# Altium PCB 100862.pcbdoc (part 1 of 3)
Units mm, origin at the board's own origin, x right, y up, seen from the top; angles counter-clockwise.
Board outline 48 x 50 mm, 4 copper layers (Top Layer, Internal Ground, Internal Power, Bottom Layer), stack 1.481 mm thick; 185 components, 111 nets, 536 pads, 346 vias.
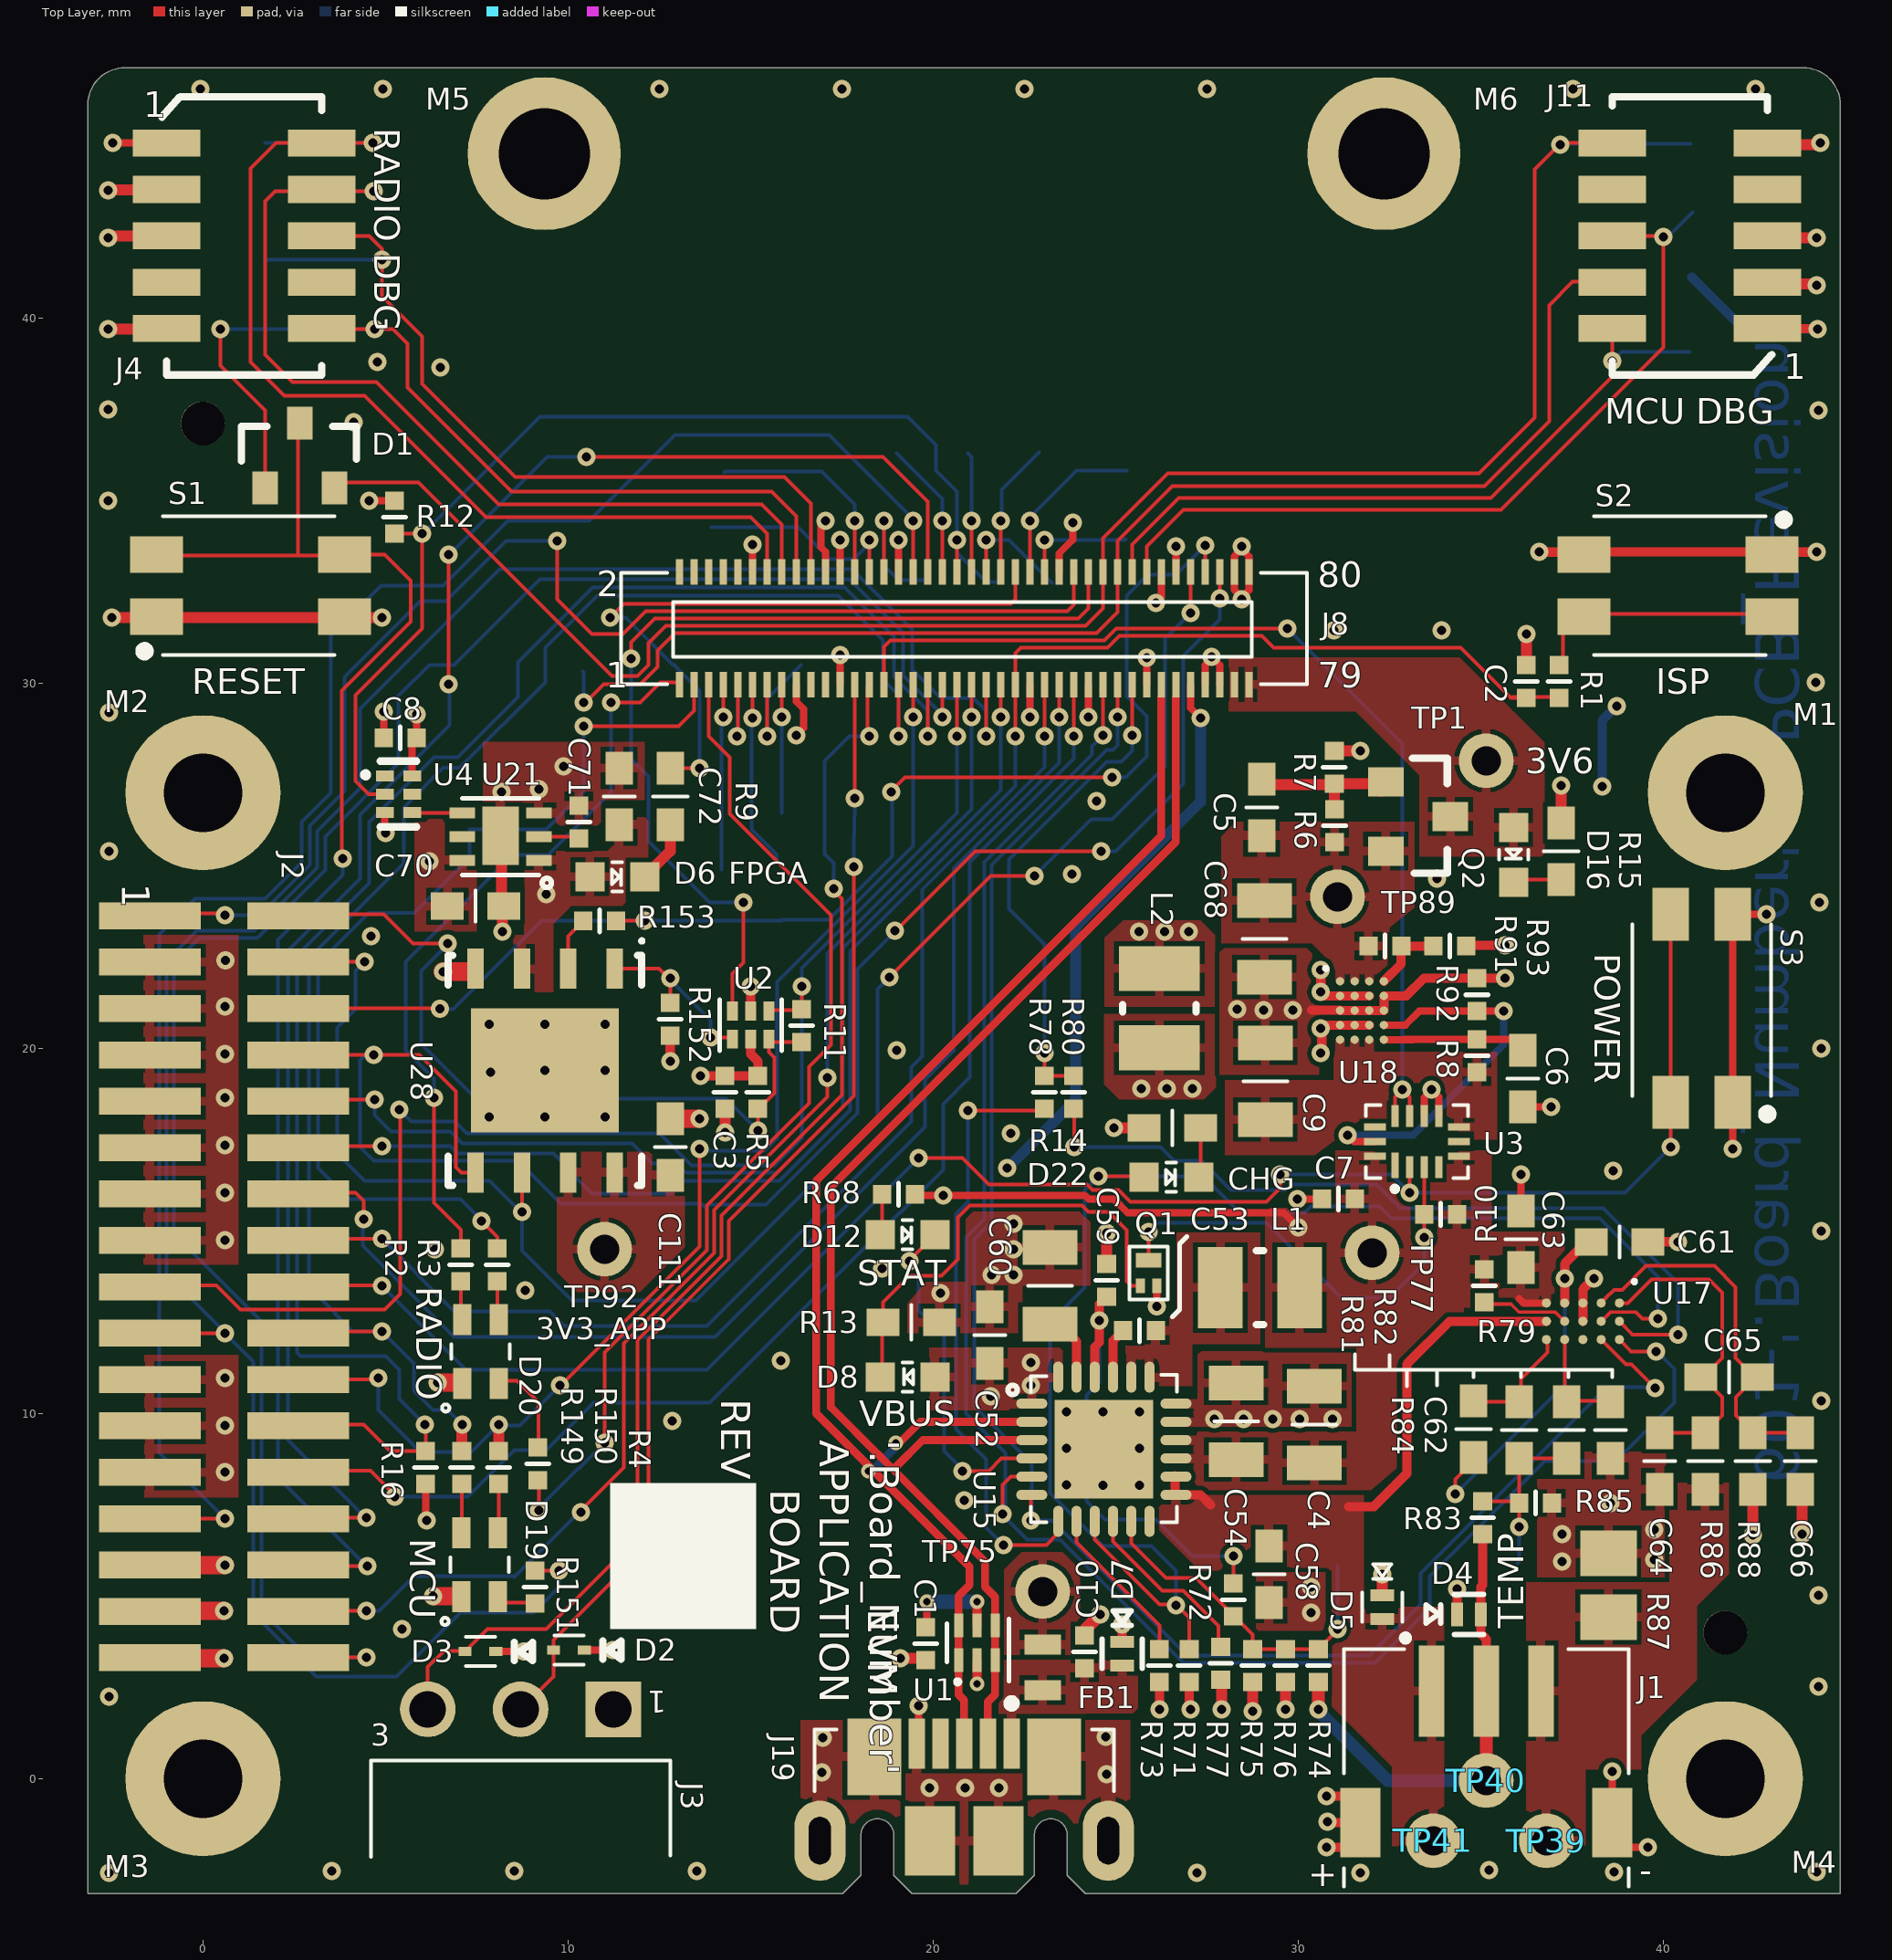
[diagram p0: Top Layer view]
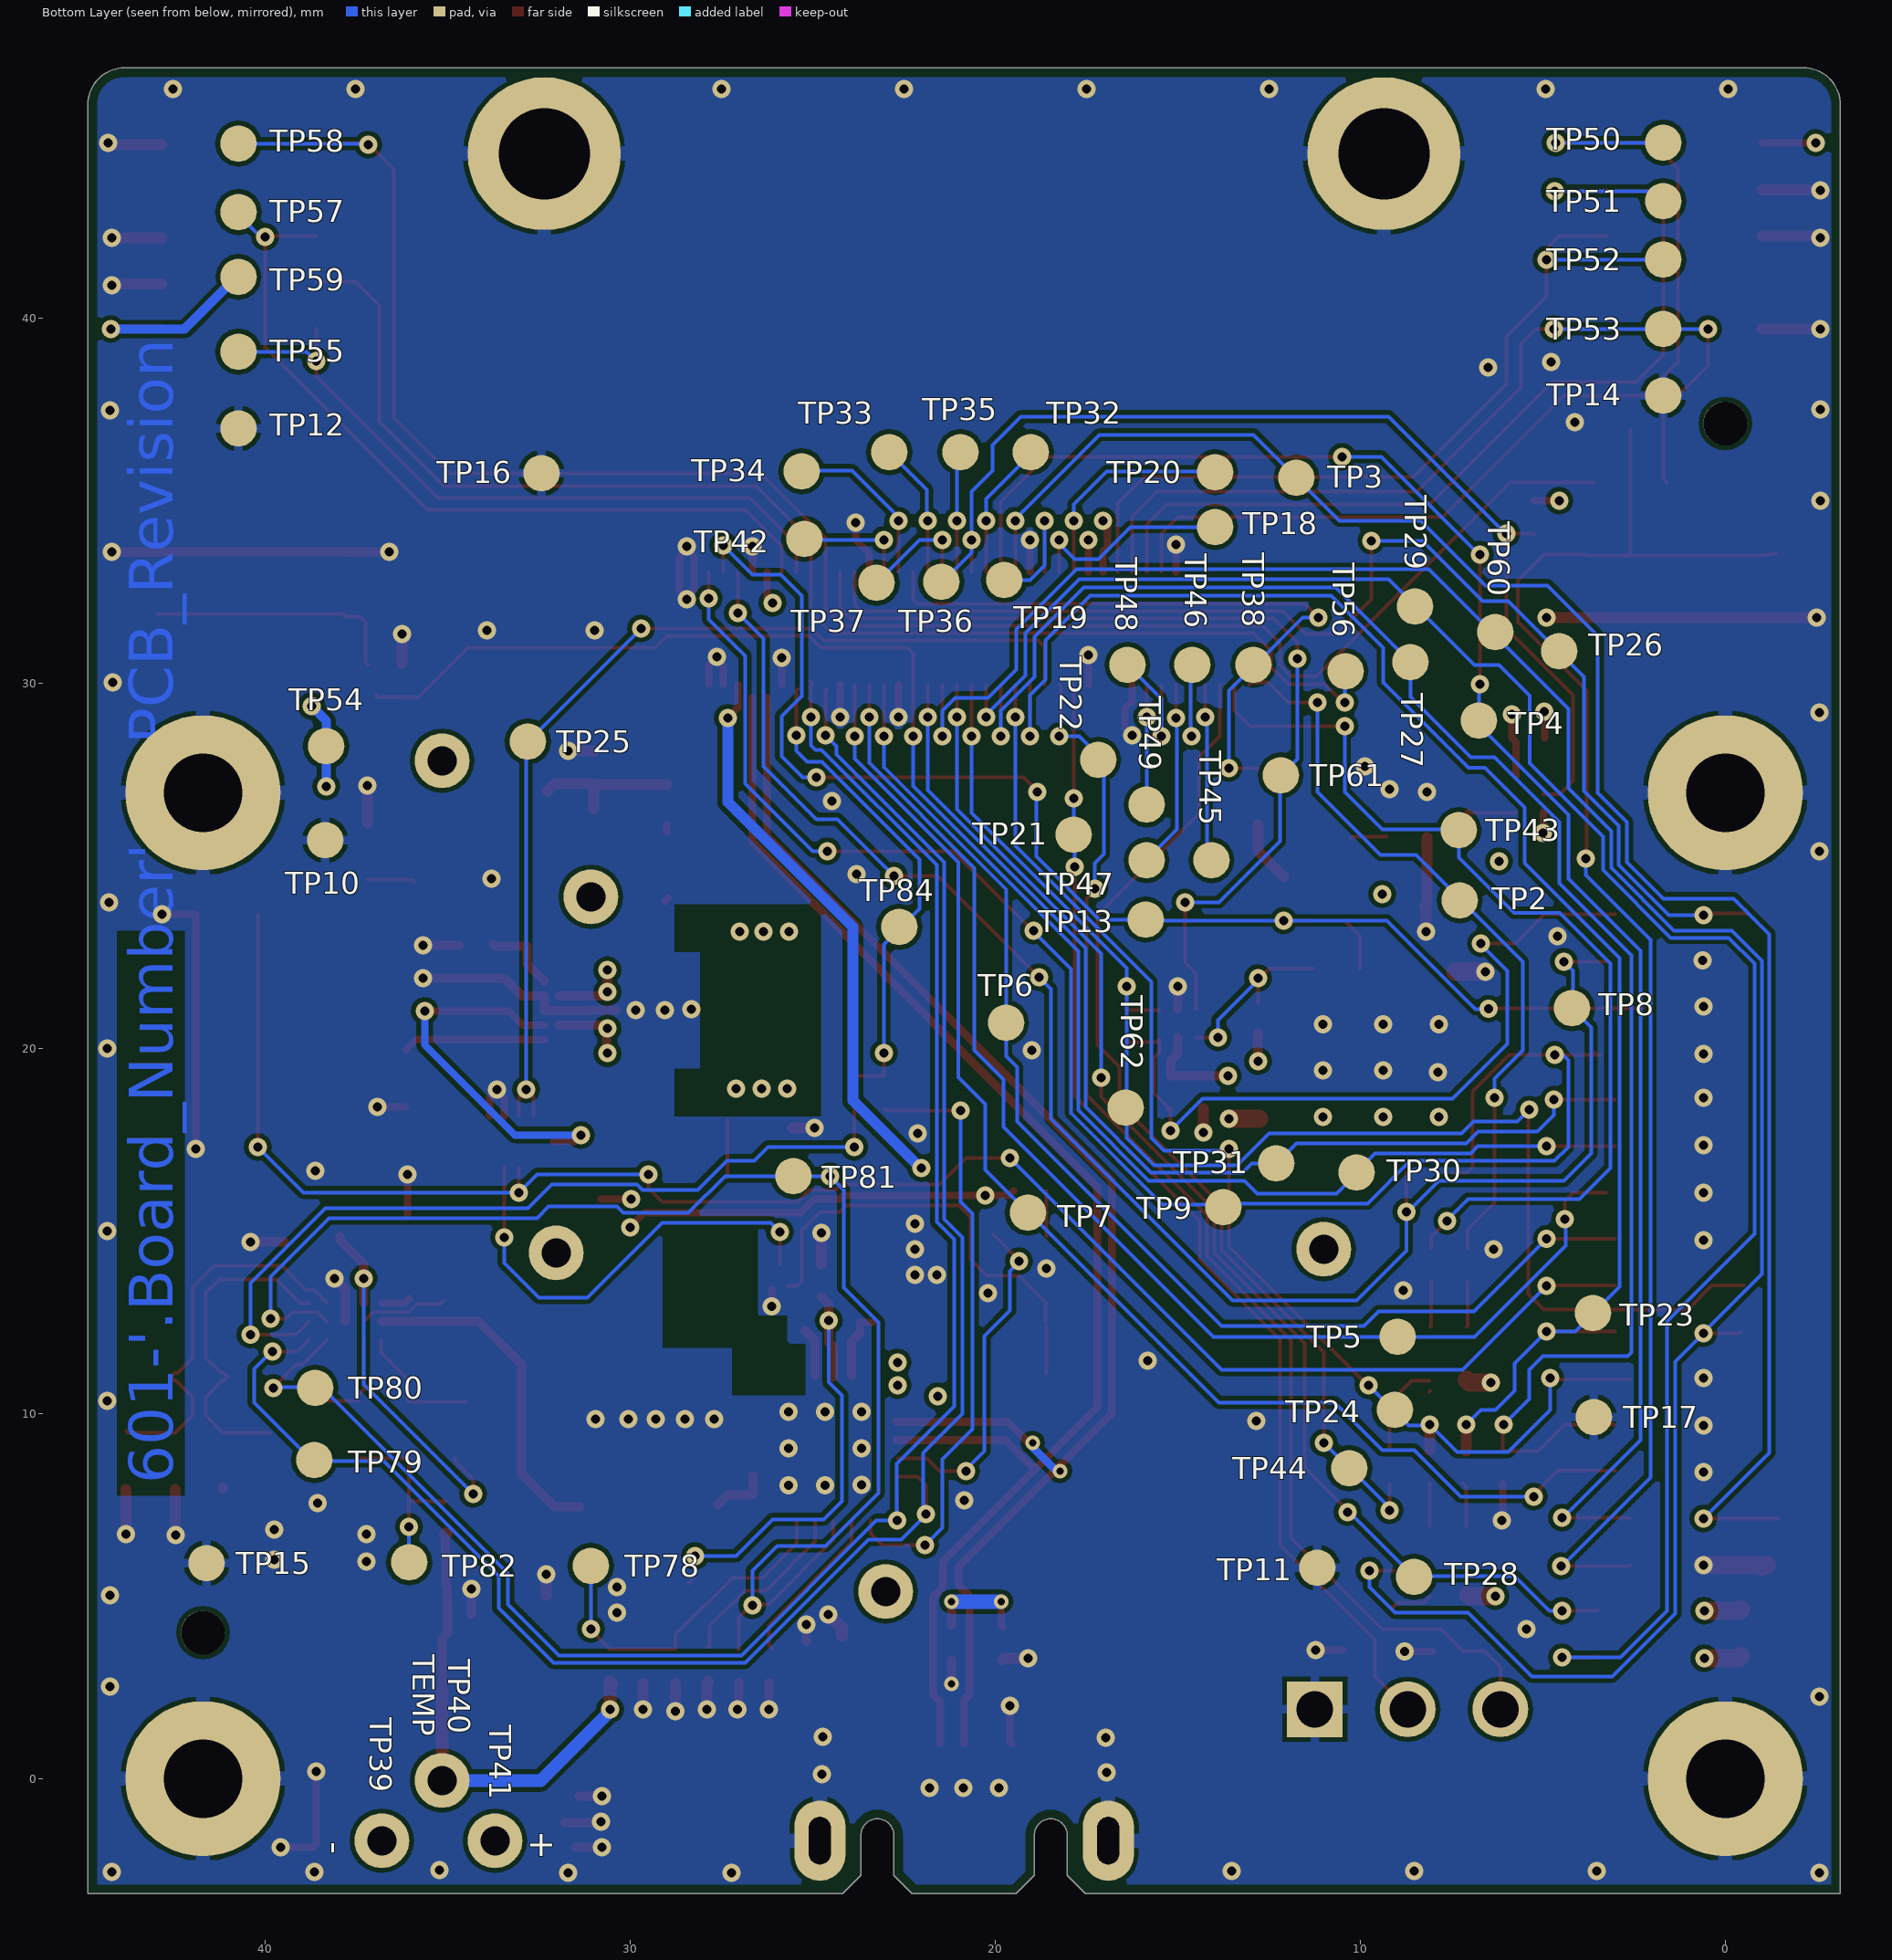
[diagram p1: Bottom Layer view, seen from below]
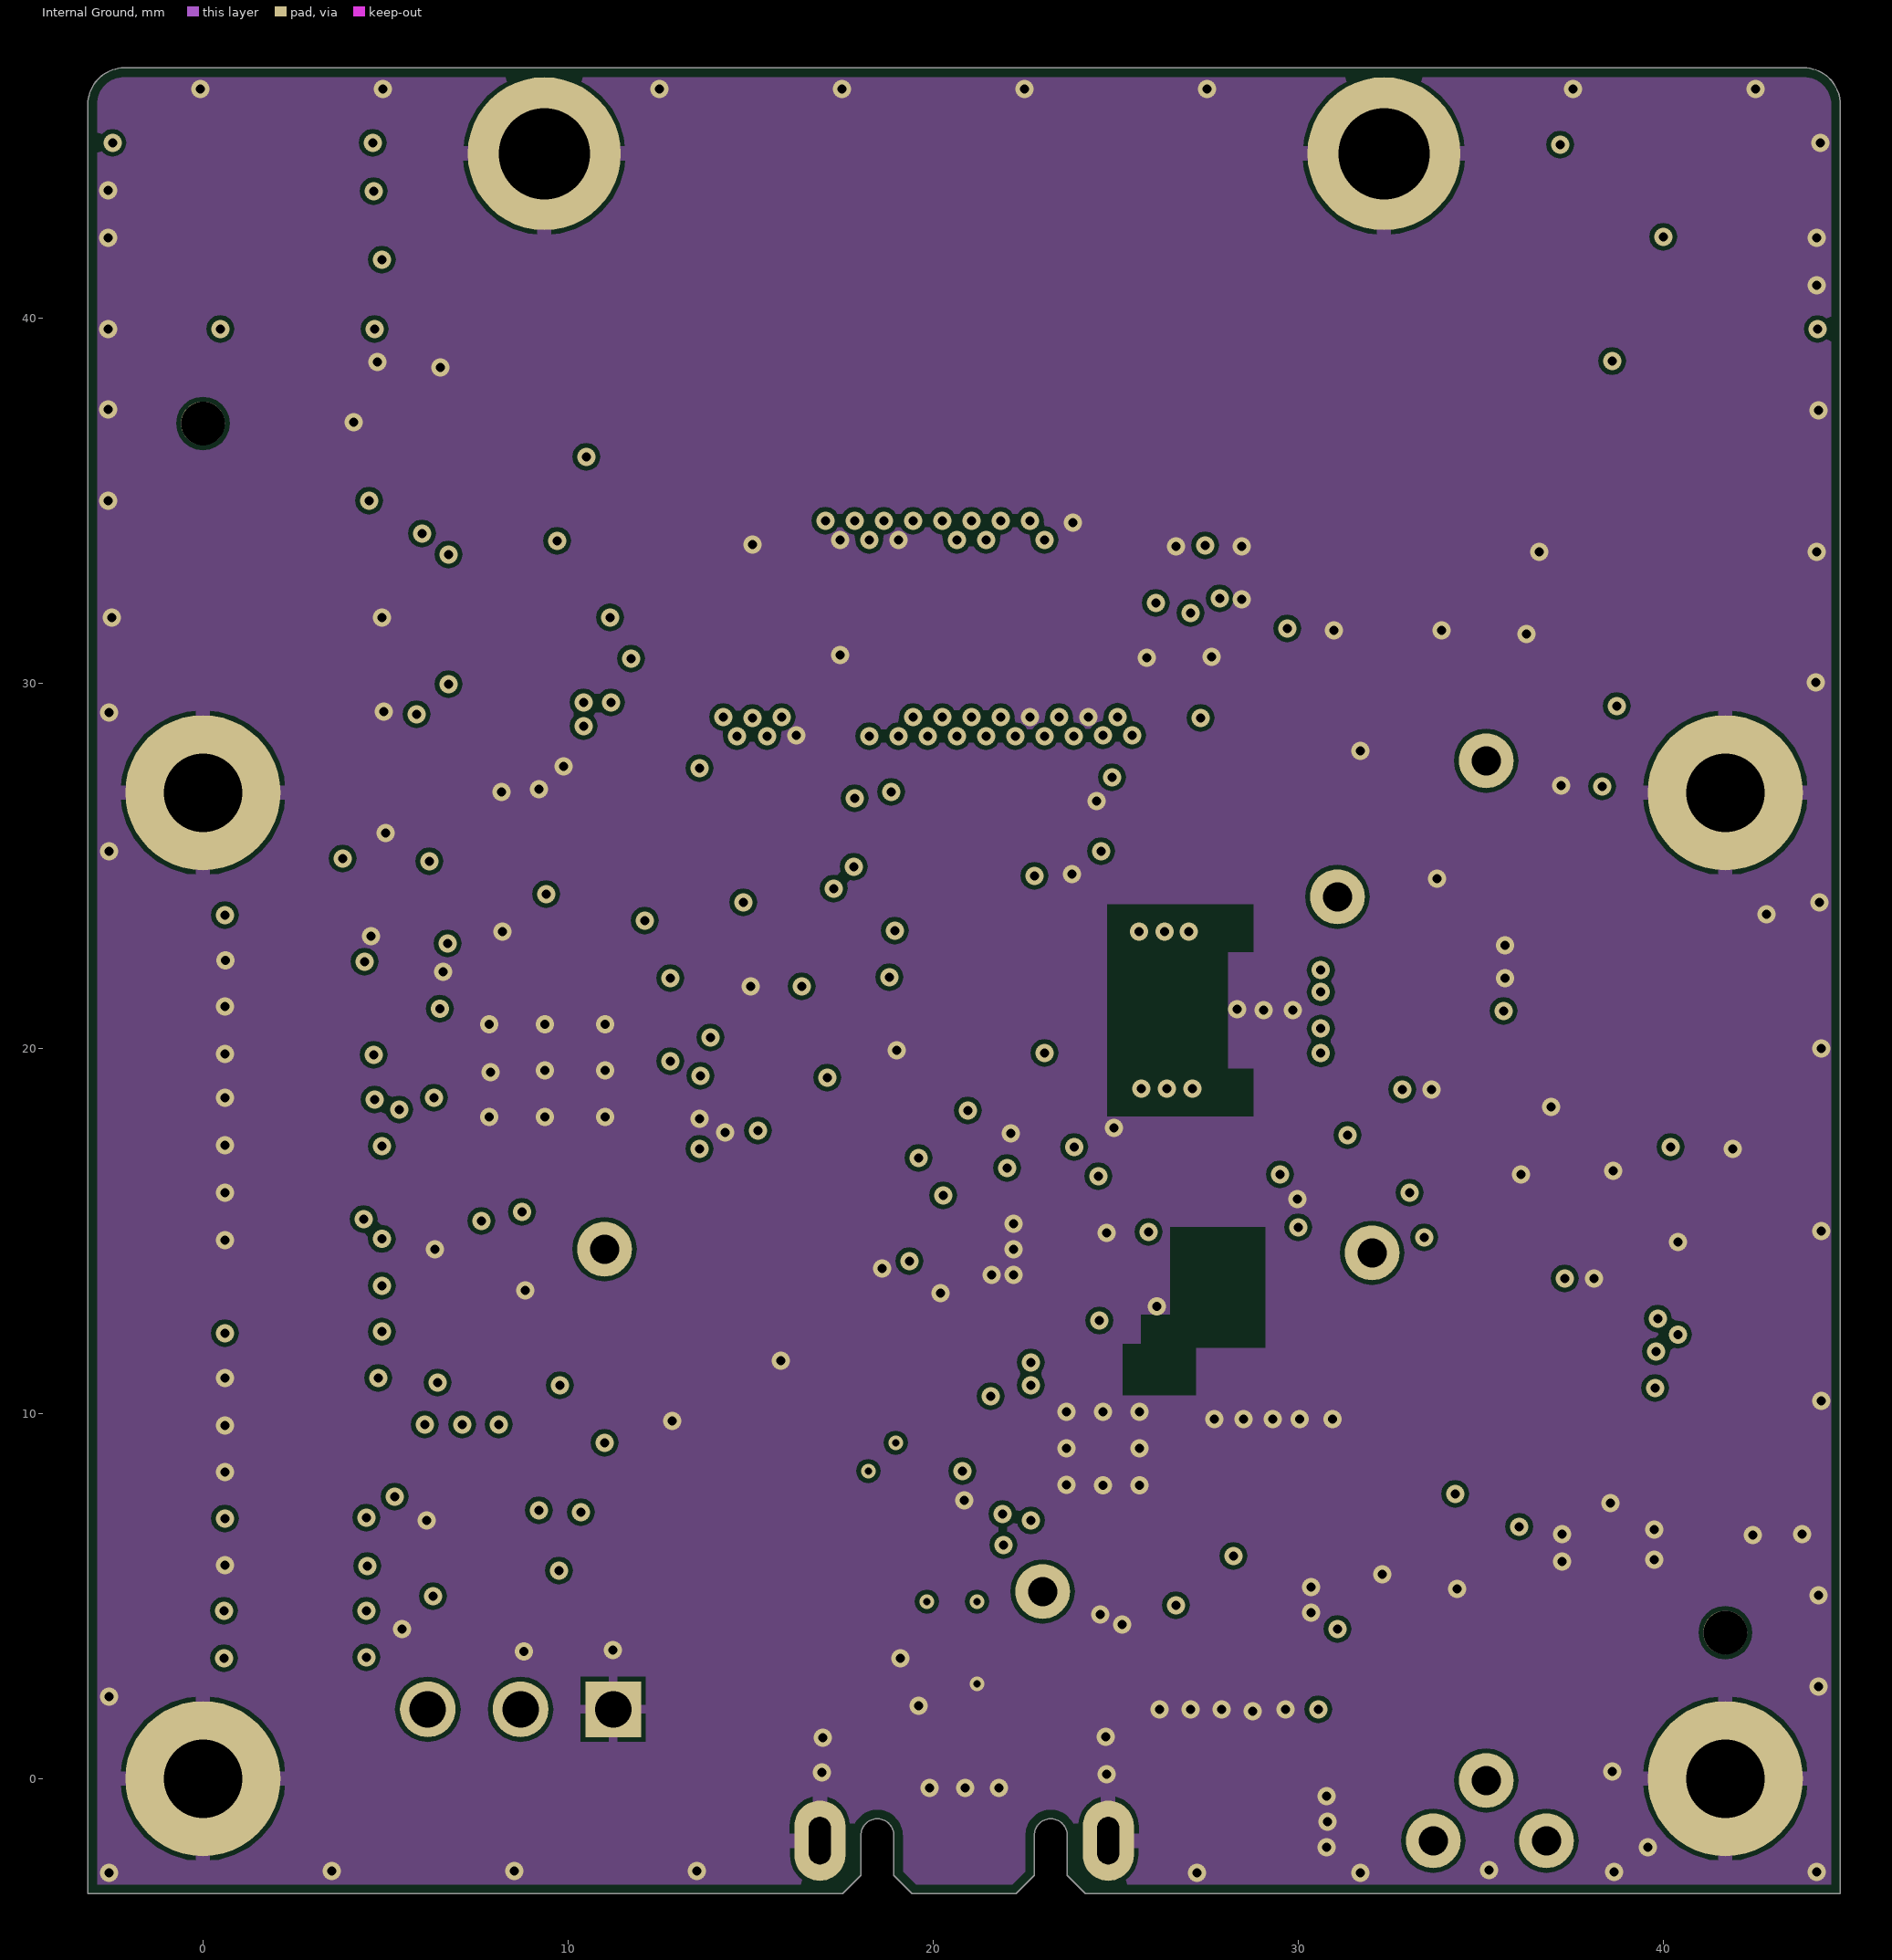
[diagram p2: Internal Ground]
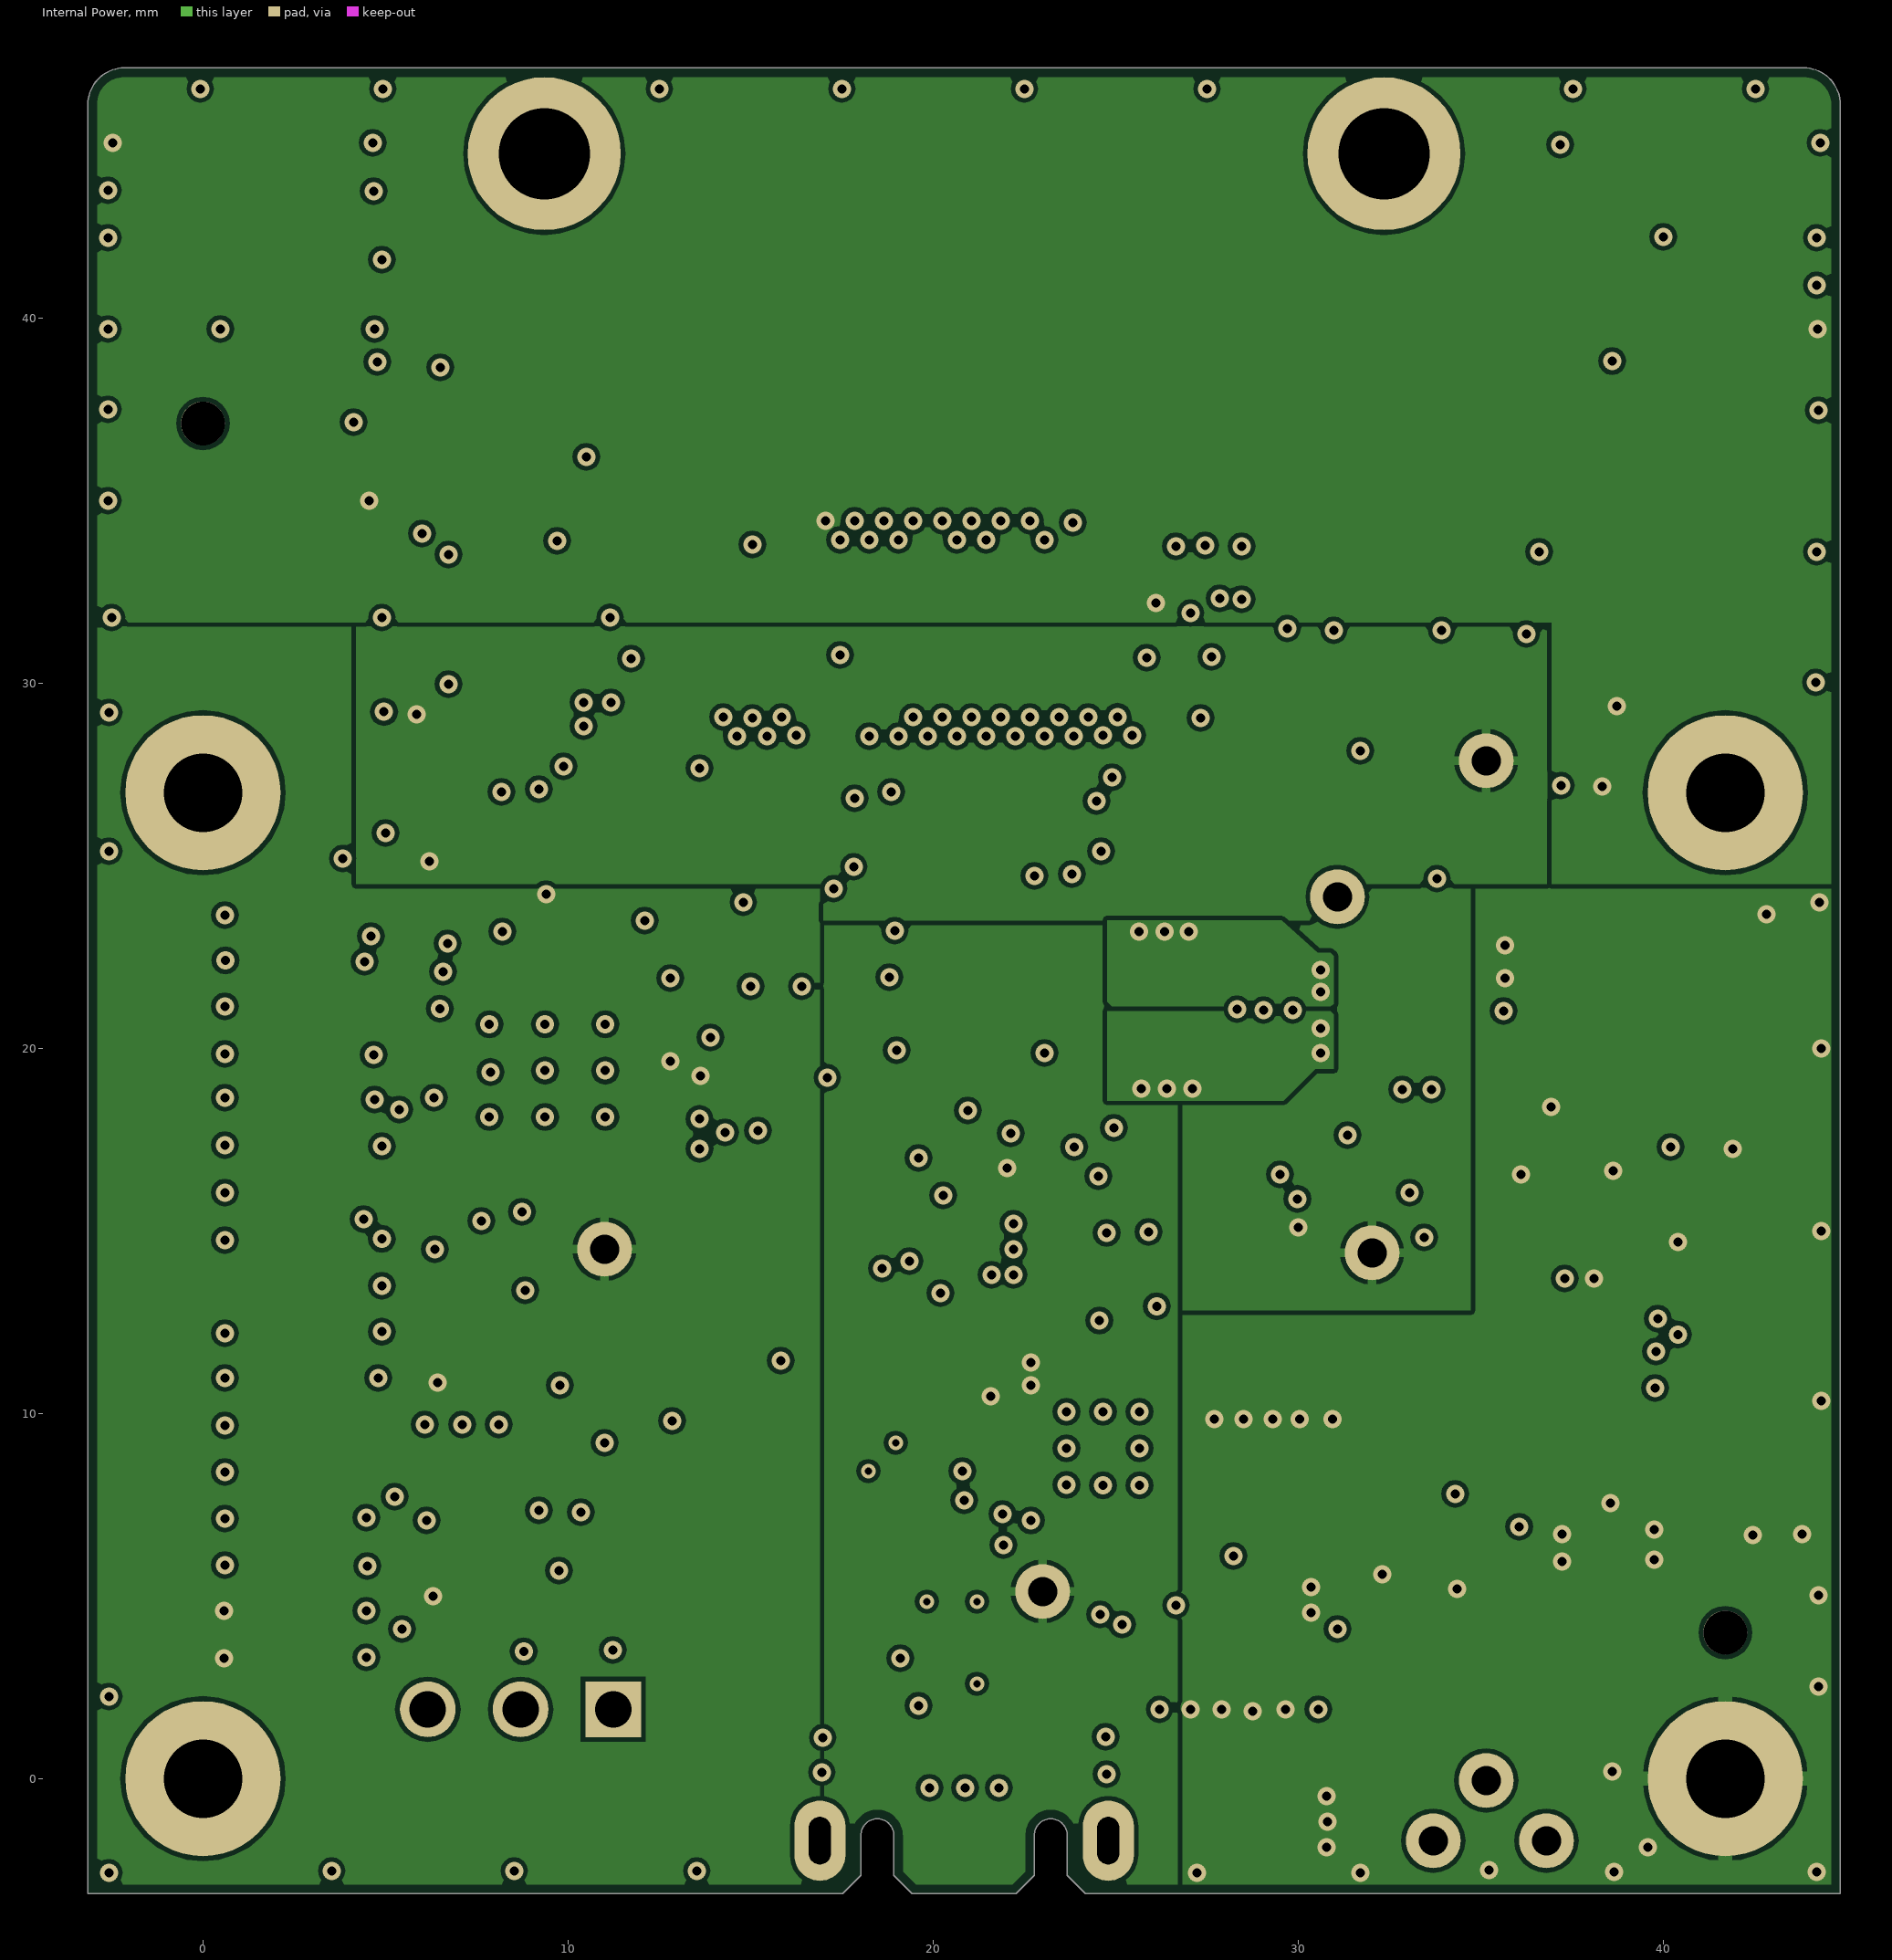
[diagram p3: Internal Power]

## Layer stack, top to bottom
Top Solder: solder mask 0.0102, Solder Resist, Dk 3.5
Top Layer: signal copper 0.0356
Dielectric 1: core 0.254, FR-4, Dk 4.2
Internal Ground: signal copper 0.036
Dielectric 3: prepreg 0.83, Dk 4.2
Internal Power: signal copper 0.036
Dielectric 2: core 0.254, Dk 4.2
Bottom Layer: signal copper 0.0356
Bottom Solder: solder mask 0.0102, Solder Resist, Dk 3.5

## Board outline
-3.15,-3.15 17.525,-3.15 18.025,-2.65 18.025,-1.55 cw(c18.475,-1.55) 18.925,-1.55 18.925,-2.65 19.425,-3.15 22.275,-3.15 22.775,-2.65 22.775,-1.55 cw(c23.225,-1.55) 23.675,-1.55 23.675,-2.65 24.175,-3.15 44.85,-3.15 44.85,45.85 ccw(c43.85,45.85) 43.85,46.85 -2.15,46.85 ccw(c-2.15,45.85) -3.15,45.85

## Design rules (kind name [scope] priority, off if disabled: settings)
BoardOutlineClearance [All] p1: gap=0.25 except(0: Text-OutlineEdge)
Clearance Clearance_1 [InNamedPolygon('VCC_3V3_CORE') vs InNet('GND')] p1: gap=0.254
Clearance PWR [OnLayer('Power')] p2: gap=0.2
Clearance ANT_PIN [InPadClass('RADIO_PIN')] p3: gap=0.25
Clearance Keepout_clear [IsKeepOut vs OnLayer('Top Layer')] p4: gap=0
Clearance Polygon_Clearance [InPolygon] p5: gap=0.125
Clearance Narrow_clearance [InNetClass('Narrow')] p6: gap=0.08
Clearance RF_Clearance [InNetClass('RF')] p7: gap=0.125
Clearance [All] p8: gap=0.1 except(0: Arc-Region Track-Region SMDPad-Region THPad-Region Via-Region Fill-Region Region-Region)
ComponentClearance [All] p1: gap=0.18 collisioncheckmode=3 verticalgap=0.18 showdistances=FALSE
DiffPairsRouting [InDifferentialPair('USB_D')] p1: maxlimit=0.152 minlimit=0.152 mostfreqgap=0.152 toplayer_minwidth=0.213 toplayer_maxwidth=0.213 toplayer_prefwidth=0.213 midlayer1_minwidth=0.213 midlayer1_maxwidth=0.213 midlayer1_prefwidth=0.213 midlayer2_minwidth=0.213 midlayer2_maxwidth=0.213 midlayer2_prefwidth=0.213 bottomlayer_minwidth=0.213 bottomlayer_maxwidth=0.213 bottomlayer_prefwidth=0.213 maxuncoupledlength=12.7
HoleSize [All] p1: absolutevalues=TRUE maxlimit=3.5 minlimit=0.025 maxpercent=80.000 minpercent=20.000
MinimumSolderMaskSliver MinimumSolderMaskSliver_1 [isvia vs IsPad] p1: minsoldermaskwidth=0
MinimumSolderMaskSliver [All] p2: minsoldermaskwidth=0.05
PlaneClearance [All] p1: clearance=0.25
PlaneConnect [All] p1: planeconnectstyle=Direct reliefexpansion=0.508 reliefentries=4 reliefconductorwidth=0.254 reliefairgap=0.254
PolygonConnect MTG_CONNECT [InPadClass('Thick_thermals')] p1: connectstyle=Relief reliefconductorwidth=0.4 reliefentries=4 polygonreliefangle="90 Angle" airgapwidth=0.125
PolygonConnect THPin [All vs InPadClass('THPin_Polygon')] p2: connectstyle=Relief reliefconductorwidth=0.254 reliefentries=4 polygonreliefangle="90 Angle" airgapwidth=0.125
PolygonConnect POLY_VIA [IsVia vs IsPolygon] p3: connectstyle=Direct reliefconductorwidth=0.254 reliefentries=4 polygonreliefangle="90 Angle" airgapwidth=0.254
PolygonConnect [All] p4: connectstyle=Relief reliefconductorwidth=0.25 reliefentries=4 polygonreliefangle="90 Angle" airgapwidth=0.125
RoomDefinition U_CoreModule [InComponentClass('U_CoreModule')] p1: confinementstyle=ConfineIn formatcopy=TRUE lockcomponents=FALSE outline 83.336,-66.209 91.237,-66.209 91.237,-39.783 83.336,-39.783
RoomDefinition U_Breakout [InComponentClass('U_Breakout')] p2 off: confinementstyle=ConfineIn formatcopy=TRUE lockcomponents=FALSE outline 48.303,13.57 48.303,5.57 54.303,5.57 54.303,13.57
RoomDefinition U_Regulation [InComponentClass('U_Regulation')] p3 off: confinementstyle=ConfineIn formatcopy=TRUE lockcomponents=FALSE outline 29.394,128.03 321.895,128.03 321.895,145.53 29.394,145.53
RoomDefinition U_Charging [InComponentClass('U_Charging')] p4 off: confinementstyle=ConfineIn formatcopy=TRUE lockcomponents=FALSE outline 138.192,-67.742 563.302,-67.742 563.302,-52.742 138.192,-52.742
RoutingVias [All] p1: holewidth=0.25 width=0.5 viastyle="Through Hole" minholewidth=0.25 minwidth=0.5 maxholewidth=0.25 maxwidth=0.5 useviatemplates=TRUE viatemplateguid#1={2D41CD12-448D-474D-BA40-36D4687D2B42} viatemplatename#1=v50h25m0mx0
SilkToSilkClearance [All] p1 off: silktosilkclearance=0
SilkToSolderMaskClearance [IsPad] p1: minsilkscreentomaskgap=0.05 clearancetoexposedcopper=TRUE
SolderMaskExpansion [All] p1: expansion=0.05
Width Narrow [InNetClass('Narrow')] p1: maxlimit=0.1 minlimit=0.08 preferedwidth=0.1
Width RF_Width [InNetClass('RF')] p2: maxlimit=0.59 minlimit=0.2 preferedwidth=0.59
Width PWR_GND [InNetClass('PWR_GND')] p3: maxlimit=1 minlimit=0.2 preferedwidth=0.3
Width CRITICAL [InNetClass('MOTOR_DRIVERS')] p4: maxlimit=0.4 minlimit=0.3 preferedwidth=0.4
Width [All] p5: maxlimit=0.508 minlimit=0.1 preferedwidth=0.1
22 further rules are at their usual default settings.

## Classes and differential pairs
net class PWR_GND: 3V6_EN 3V6_FB 3V6_OUT 3V6_VINA BAT_CE BATT+ BATT- BATT_TS GND USB_VBUS V_SYS VBUS_IN VCC_3V3_APP VCC_3V3_CORE VCC_3V6
component class U_CoreModule: J8 M5 M6
component class U_Charging: C1 C4 C10 C52 C53 C54 C58 C59 C60 C61 C62 C63 C64 C65 C66 D4 D5 D7 D8 D12 D22 FB1 J1 J19 L1 Q1 R13 R14 R68 R71 R72 R73 R74 R75 R76 R77 R78 R79 R80 R81 R82 R83 R84 R85 R86 R87 R88 TP10 TP11 TP12 TP39 TP40 TP41 TP75 TP77 TP78 TP79 TP80 TP81 TP82 TP84 U1 U15 U17
component class U_Breakout: C2 C3 C111 D1 D2 D3 D6 D19 D20 J2 J3 J4 J11 R1 R2 R3 R4 R5 R9 R11 R12 R16 R149 R150 R151 R152 R153 S1 S2 TP2 TP3 TP4 TP5 TP6 TP7 TP8 TP9 TP13 TP14 TP15 TP16 TP17 TP18 TP19 TP20 TP21 TP22 TP23 TP24 TP25 TP26 TP27 TP28 TP29 TP30 TP31 TP32 TP33 TP34 TP35 TP36 TP37 TP38 TP42 TP43 TP44 TP45 TP46 TP47 TP48 TP49 TP50 TP51 TP52 TP53 TP54 TP55 TP56 TP57 TP58 TP59 TP60 TP61 TP62 U2 U28
component class U_Regulation: C5 C6 C7 C8 C9 C68 C70 C71 C72 D16 L2 M1 M2 M3 M4 P1 Q2 R6 R7 R8 R10 R15 R91 R92 R93 S3 TP1 TP89 TP92 U3 U4 U18 U21
pad class THPin_Polygon: J8-1 J8-2 J8-3 J8-4 J8-5 J8-6 J8-7 J8-8 J8-9 J8-10
pad class Thick_thermals: J19-10 J19-11 M1-1 M2-1 M3-1 M4-1 M5-1 M6-1
net class Narrow: BAT_CE CHG_C\E\
differential pair DP_CON: +"" -""
differential pair USB_D: +USB_D_P -USB_D_N
differential pair SR: +SRP -SRN

## Components (designator, comment, footprint, x,y, rotation, side; value= is the part's Value field where it differs from the comment)
C1 "0.1uF" 0402-IPCsm_55#1 19.8,3.7 r270 top
C2 "0.1uF" 0402-IPCsm_55#1 36.25,30.05 r90 top
C3 "0.1uF" 0402-IPCsm_55#1 14.3,18.8 r90 top
C4 "47uF" 0805-ipcsm_145#1 30.447,9.7 r90 top
C5 "1uF" 0603-IPCsm_90#1 29,26.6 r270 top
C6 "0.1UF" 0603-ipcsm_90#1 36.15,19.175 r90 top
C7 "0.1uF" 0402-IPCsm_55#1 31.1,15.875 r0 top
C8 "0.1uF" 0402-IPCsm_55#1 5.4,28.5 r0 top
C9 "47uF" 0805-ipcsm_145#1 29.1,19.1 r90 top
C10 "0.1uF" 0402-IPCsm_55#1 24.15,3.475 r270 top
C52 "1uF" 0603-IPCsm_90#2 21.554,12.148 r270 top
C53 "0.047uF" 0402-IPCsm_55#2 25.654,12.268 r180 top
C54 "47uF" 0805-ipcsm_145#1 28.301,9.787 r90 top
C58 "1uF" 0603-IPCsm_90#2 29.2,5.6 r90 top
C59 "10uF" 0402-IPCsm_55#2 24.754,13.648 r90 top
C60 "22uF" 0805-IPCsm_100 23.2,13.5 r90 top
C61 "1uF" 0603-IPCsm_90#2 38.8,14.7 r180 top
C62 "0.1uF" 0603-ipcsm_90#2 38.554,9.548 r90 top
C63 "0.1uF" 0603-ipcsm_90#2 36.1,14.775 r270 top
C64 "0.1uF" 0603-ipcsm_90#2 39.9,8.7 r90 top
C65 "0.1uF" 0603-ipcsm_90#2 41.8,11 r180 top
C66 "0.1uF" 0603-ipcsm_90#2 43.754,8.7 r270 top
C68 "47uF" 0805-ipcsm_145#2 29.075,23 r270 top
C70 "10uF" 0603-IPCsm_90#2 7.472,23.89 r180 top
C71 "0.01uF" 0402-IPCsm_55#2 10.3,26.2 r90 top
C72 "10uF" 0603-IPCsm_90#2 11.4,26.9 r270 top
C111 "0.1uF" 0603-ipcsm_90#2 12.8,17.3 r90 top
D1 "BAV70LT1G" SOT23_44H 2.65,36.472 r0 top
D2 "ESD9R3.3ST5G" sod923-40 10.025,3.525 r0 top
D3 "ESD9R3.3ST5G" sod923-40 7.6,3.486 r0 top
D4 "SP1003-01ETG" SOD882-60 34.675,4.5 r180 top
D5 "SP1003-01ETG" SOD882-60 32.3,4.7 r90 top
D6 "Green" led_ltst-c191kgkt_s80#1 11.35,24.7 r0 top
D7 "SP1003-01ETG" SOD882-60 25.175,3.425 r90 top
D8 "Green" led_ltst-c191kgkt_s80#2 19.3,11 r180 top
D12 "Green" led_ltst-c191kgkt_s80#2 19.3,14.9 r0 top
D16 "Green" led_ltst-c191kgkt_s80#2 35.9,25.3 r270 top
D19 "APTF1616SEEZGQBDC" led_RBG_1p6x1p6_sm 7.583,5.857 r270 top
D20 "APTF1616SEEZGQBDC" led_RBG_1p6x1p6_sm 7.6,11.7 r270 top
D22 "Red" led_ltst-c191kgkt_s80#2 26.525,16.475 r0 top
FB1 "200ohm, 2A" ind-0603_38H 23,3.05 r270 top
J1 "S3B-ZR-SM4A-TF(LF)(SN)" CON_JST_S3B-ZR-SM4A 35.15,1.15 r180 top
J2 "FTSH-117-01-F-DV-K" FTSH-117-01-XXX-DV-K 0.58,13.47 r270 top
J3 "HTSW-103-08-G-S-RA" CON_HDR_1X3_RA 8.7,1.9 r180 top
J4 "GRPB052VWQS-RC" con_hdr_2x5_smt_50l#1 1.125,42.25 r0 top locked
J8 "DF40HC(3.0)-80DS-0.4V" con80_hirose-df40c-80ds_129h 20.85,31.5 r180 top locked
J11 "GRPB052VWQS-RC" con_hdr_2x5_smt_50l#2 40.725,42.25 r180 top locked
J19 "MICROUSB_RA" CON_USB_MOLEX_105164-0001 20.85,0.96 r180 top locked
L1 "1uH" ind-1008_35H 28.954,13.448 r0 top
L2 "1uH" ind-1008_35H 26.2,21.1 r270 top
M1 "MTGC425H215P" MTGC425H215P 41.707,27.011 r180 top locked
M2 "MTGC425H215P" MTGC425H215P 0.007,27.011 r180 top locked
M3 "MTGC425H215P" MTGC425H215P 0.007,0.011 r180 top locked
M4 "MTGC425H215P" MTGC425H215P 41.707,0.011 r180 top locked
M5 "SMTSO-M1-3ET" standoff_hole2p50p 9.35,44.5 r0 top
M6 "SMTSO-M1-3ET" standoff_hole2p50p 32.35,44.5 r0 top
Q1 "DMN65D8LFB-7B" DFN3-1006_50H 25.9,13.85 r90 top
Q2 "IRLML6401PbF" SOT23_112 32.4,27.3 r270 top
R1 "100" 0402-IPCsm_40#1 37.15,30.05 r90 top
R2 "240" 0402-IPCsm_40#1 7.061,14.065 r270 top
R3 "124" 0402-IPCsm_40#2 8.062,14.065 r270 top
R4 "124" 0402-IPCsm_40#2 9.175,8.625 r90 top
R5 "10K" 0402-IPCsm_40#1 15.2,18.8 r270 top
R6 "100K" 0402-IPCsm_40#1 31,26.1 r90 top
R7 "100K" 0402-IPCsm_40#1 30.99,27.7 r90 top
R8 "0" 0402-IPCsm_40#1 34.9,19.8 r90 top
R9 "1K" 0603-IPCsm_56#1 12.8,26.9 r90 top
R10 "3.0K" 0402-IPCsm_40#1 33.9,15.45 r180 top
R11 "0" 0402-IPCsm_40#1 16.4,20.625 r270 top
R12 "10K" 0402-IPCsm_40#1 5.25,34.55 r270 top
R13 "1K" 0603-IPCsm_56#2 19.4,12.5 r0 top
R14 "1K" 0603-IPCsm_56#2 26.55,17.825 r180 top
R15 "1K" 0603-IPCsm_56#2 37.2,25.4 r90 top
R16 "10K" 0402-IPCsm_40#1 6.1,8.525 r270 top
R68 "2.2K" 0402-IPCsm_40#2 19.05,16 r180 top
R71 "10K" 0402-IPCsm_40#2 27.016,3.1 r270 top
R72 "5.23K" 0402-IPCsm_40#2 28.225,4.9 r270 top
R73 "10K" 0402-IPCsm_40#2 26.2,3.1 r270 top
R74 "0" 0402-IPCsm_40#2 30.554,3.1 r270 top
R75 "31.6k" 0402-IPCsm_40#2 28.754,3.1 r270 top
R76 "10K" 0402-IPCsm_40#2 29.654,3.1 r270 top
R77 "430" 0402-IPCsm_40#2 27.88,3.161 r270 top
R78 "0" 0402-IPCsm_40#2 23.05,18.8 r90 top
R79 "10K" 0402-IPCsm_40#2 35.1,13.5 r270 top
R80 "0" 0402-IPCsm_40#2 23.85,18.8 r90 top
R81 "1.80M" 0603-IPCsm_56#2 34.8,9.575 r90 top
R82 "18.2K" 0603-IPCsm_56#2 36.054,9.548 r90 top
R83 "0" 0402-IPCsm_40#2 35.054,7.148 r270 top
R84 "1K" 0603-IPCsm_56#2 37.354,9.548 r270 top
R85 "10K" 0402-IPCsm_40#2 36.504,7.548 r0 top
R86 "100" 0603-IPCsm_56#2 41.154,8.7 r270 top
R87 "0.01" r-0805_20H 38.5,5.3 r90 top
R88 "100" 0603-IPCsm_56#2 42.454,8.7 r270 top
R91 "523K" 0402-IPCsm_40#2 32.375,22.8 r0 top
R92 "10K" 0402-IPCsm_40#2 34.897,21.465 r90 top
R93 "143K" 0402-IPCsm_40#2 34.15,22.8 r0 top
R149 "240" 0402-IPCsm_40#2 7.089,8.525 r270 top
R150 "124" 0402-IPCsm_40#2 8.1,8.525 r270 top
R151 "124" 0402-IPCsm_40#2 9.1,5.25 r270 top
R152 "10K" 0402-IPCsm_40#2 12.8,20.8 r90 top
R153 "33" 0402-IPCsm_40#2 10.872,23.49 r180 top
S1 "EVQ-P2T02W" SW_EVQP2 1.3,32.675 r0 top
S2 "EVQ-P2T02W" SW_EVQP2 40.4,32.675 r180 top
S3 "EVQ-P2T02W" SW_EVQP2 41.05,21.1 r90 top
TP1 "TPC150H080P" TPC150H080P 35.15,27.875 r270 top
TP2 "tp-1mm" TP-S100_SMT 7.275,24.05 r270 bottom
TP3 "tp-1mm" TP-S100_SMT 11.75,35.625 r270 bottom
TP4 "tp-1mm" TP-S100_SMT 6.75,28.975 r270 bottom
TP5 "tp-1mm" TP-S100_SMT 8.975,12.1 r90 bottom
TP6 "tp-1mm" TP-S100_SMT 19.7,20.7 r90 bottom
TP7 "tp-1mm" TP-S100_SMT 19.1,15.5 r90 bottom
TP8 "tp-1mm" TP-S100_SMT 4.2,21.1 r270 bottom
TP9 "tp-1mm" TP-S100_SMT 13.75,15.65 r270 bottom
TP10 "tp-1mm" TP-S100_SMT 38.35,25.7 r180 bottom
TP11 "tp-1mm" TP-S100_SMT 11.175,5.775 r0 bottom
TP12 "tp-1mm" TP-S100_SMT 40.725,36.975 r90 bottom
TP13 "tp-1mm" TP-S100_SMT 15.875,23.525 r270 bottom
TP14 "tp-1mm" TP-S100_SMT 1.7,37.875 r90 bottom
TP15 "tp-1mm" TP-S100_SMT 41.6,5.9 r270 bottom
TP16 "tp-1mm" TP-S100_SMT 32.425,35.75 r90 bottom
TP17 "tp-1mm" TP-S100_SMT 3.6,9.9 r90 bottom
TP18 "tp-1mm" TP-S100_SMT 13.975,34.275 r270 bottom
TP19 "tp-1mm" TP-S100_SMT 19.75,32.825 r270 bottom
TP20 "tp-1mm" TP-S100_SMT 13.975,35.775 r270 bottom
TP21 "tp-1mm" TP-S100_SMT 17.85,25.85 r270 bottom
TP22 "tp-1mm" TP-S100_SMT 17.175,27.9 r270 bottom
TP23 "tp-1mm" TP-S100_SMT 3.625,12.75 r270 bottom
TP24 "tp-1mm" TP-S100_SMT 9.05,10.1 r270 bottom
TP25 "tp-1mm" TP-S100_SMT 32.8,28.4 r270 bottom
TP26 "tp-1mm" TP-S100_SMT 4.55,30.875 r270 bottom
TP27 "tp-1mm" TP-S100_SMT 8.625,30.575 r270 bottom
TP28 "tp-1mm" TP-S100_SMT 8.525,5.525 r270 bottom
TP29 "tp-1mm" TP-S100_SMT 8.5,32.1 r270 bottom
TP30 "tp-1mm" TP-S100_SMT 10.1,16.6 r270 bottom
TP31 "tp-1mm" TP-S100_SMT 12.3,16.85 r270 bottom
TP32 "tp-1mm" TP-S100_SMT 19.025,36.325 r270 bottom
TP33 "tp-1mm" TP-S100_SMT 22.9,36.325 r270 bottom
TP34 "tp-1mm" TP-S100_SMT 25.3,35.8 r270 bottom
TP35 "tp-1mm" TP-S100_SMT 20.95,36.325 r270 bottom
TP36 "tp-1mm" TP-S100_SMT 21.475,32.775 r270 bottom
TP37 "tp-1mm" TP-S100_SMT 23.25,32.75 r270 bottom
TP38 "tp-1mm" TP-S100_SMT 12.925,30.5 r270 bottom
TP39 "TPC150H080P" TPC150H080P 36.8,-1.7 r270 top
TP40 "TPC150H080P" TPC150H080P 35.15,-0.05 r270 top
TP41 "TPC150H080P" TPC150H080P 33.7,-1.7 r0 top
TP42 "tp-1mm" TP-S100_SMT 25.225,33.95 r270 bottom
TP43 "tp-1mm" TP-S100_SMT 7.3,25.975 r270 bottom
TP44 "tp-1mm" TP-S100_SMT 10.3,8.5 r270 bottom
TP45 "tp-1mm" TP-S100_SMT 14.075,25.15 r270 bottom
TP46 "tp-1mm" TP-S100_SMT 14.6,30.5 r270 bottom
TP47 "tp-1mm" TP-S100_SMT 15.85,25.15 r270 bottom
TP48 "tp-1mm" TP-S100_SMT 16.375,30.5 r270 bottom
TP49 "tp-1mm" TP-S100_SMT 15.85,26.675 r270 bottom
TP50 "tp-1mm" TP-S100_SMT 1.7,44.8 r270 bottom
TP51 "tp-1mm" TP-S100_SMT 1.7,43.2 r270 bottom
TP52 "tp-1mm" TP-S100_SMT 1.7,41.6 r270 bottom
TP53 "tp-1mm" TP-S100_SMT 1.7,39.7 r270 bottom
TP54 "tp-1mm" TP-S100_SMT 38.325,28.275 r270 bottom
TP55 "tp-1mm" TP-S100_SMT 40.725,39.075 r270 bottom
TP56 "tp-1mm" TP-S100_SMT 10.4,30.325 r270 bottom
TP57 "tp-1mm" TP-S100_SMT 40.725,42.9 r270 bottom
TP58 "tp-1mm" TP-S100_SMT 40.725,44.775 r270 bottom
TP59 "tp-1mm" TP-S100_SMT 40.725,41.125 r270 bottom
TP60 "tp-1mm" TP-S100_SMT 6.3,31.4 r180 bottom
TP61 "tp-1mm" TP-S100_SMT 12.175,27.475 r270 bottom
TP62 "tp-1mm" TP-S100_SMT 16.425,18.375 r270 bottom
TP75 "TPC150H080P" TPC150H080P 23,5.125 r180 top
TP77 "TPC150H080P" TPC150H080P 32.025,14.4 r270 top
TP78 "tp-1mm" TP-S100_SMT 31.075,5.825 r0 bottom
TP79 "tp-1mm" TP-S100_SMT 38.65,8.725 r90 bottom
TP80 "tp-1mm" TP-S100_SMT 38.625,10.7 r0 bottom
TP81 "tp-1mm" TP-S100_SMT 25.525,16.5 r270 bottom
TP82 "tp-1mm" TP-S100_SMT 36.05,5.925 r90 bottom
TP84 "tp-1mm" TP-S100_SMT 22.625,23.325 r90 bottom
TP89 "TPC150H080P" TPC150H080P 31.075,24.15 r0 top
TP92 "TPC150H080P" TPC150H080P 11,14.5 r90 top
U1 "USBULC6-2M6" "UQFN6_ USBULC6-2M6" 21.2,3.725 r0 top
U2 "SN74LVC1G18" SON6_TI_DRY 15,20.635 r180 top
U3 "SLG4B41337" stqfn14_250x160x60 33.25,17.45 r90 top
U4 "NC7S04L6X" DFN6-NC7S04_110H 5.358,26.964 r270 top
U15 "BQ24297" QFN24_BQ24297RGE 24.679,9.02 r0 top
U17 "BQ27520" BGA15_BQ27520YZFR 37.8,12.525 r270 top
U18 "TPS630250" bga20_tps630252-YFF 31.748,21.037 r0 top
U21 "TPS73733DRVR" SON6_TPS73733DRV 8.15,25.8 r90 top
U28 "N25Q032A13EF640E" MLP8_N25Q032A_F6 9.372,19.39 r270 top

## Footprints (in the part's own frame and the unit in brackets; to place one, negate y for a bottom-side part, rotate by r counter-clockwise, add the part's x,y. Pads: shape width x height; smd on the part's side, far side on the other; paste and mask are expansions set on the pad)
0402-IPCsm_40#1 [mm] "0402-IPCSM_40"
  rect 0.5x0.52 smd mask+0.05: 1(-0.45,0) 2(0.45,0)
  silkscreen extent 0,-0.3 0,0.3, body extent -0.5,-0.2 0.5,0.2, height 0.4
0402-IPCsm_40#2 [mm] "0402-IPCSM_40"
  rect 0.5x0.52 smd: 1(-0.45,0) 2(0.45,0)
  silkscreen extent 0,-0.3 0,0.3, body extent -0.5,-0.2 0.5,0.2, height 0.4
0402-IPCsm_55#1 [mm] "0402-IPCSM_55"
  rect 0.5x0.52 smd mask+0.05: 1(-0.45,0) 2(0.45,0)
  silkscreen extent 0,-0.3 0,0.3, body extent -0.5,-0.2 0.5,0.2, height 0.55
0402-IPCsm_55#2 [mm] "0402-IPCSM_55"
  rect 0.5x0.52 smd: 1(-0.45,0) 2(0.45,0)
  silkscreen extent 0,-0.3 0,0.3, body extent -0.5,-0.2 0.5,0.2, height 0.55
0603-IPCsm_56#1 [mm] "0603-IPCSM_56"
  rect 0.9x0.75 smd mask+0.05: 1(-0.775,0) 2(0.775,0)
  silkscreen extent 0,-0.47 0,0.48, body extent -0.8,-0.3 0.8,0.3, height 0.56
0603-IPCsm_56#2 [mm] "0603-IPCSM_56"
  rect 0.9x0.75 smd: 1(-0.775,0) 2(0.775,0)
  silkscreen extent 0,-0.47 0,0.48, body extent -0.8,-0.3 0.8,0.3, height 0.56
0603-IPCsm_90#1 [mm] "0603-IPCSM_90"
  rect 0.9x0.75 smd mask+0.05: 1(0.775,0) 2(-0.775,0)
  silkscreen extent 0,-0.42 0,0.42, body extent -0.8,-0.3 0.8,0.3, height 0.9
0603-IPCsm_90#2 [mm] "0603-IPCSM_90"
  rect 0.9x0.75 smd: 1(0.775,0) 2(-0.775,0)
  silkscreen extent 0,-0.42 0,0.42, body extent -0.8,-0.3 0.8,0.3, height 0.9
0603-ipcsm_90#1 [mm] "0603-IPCSM_90"
  rect 0.9x0.75 smd mask+0.05: 1(0.775,0) 2(-0.775,0)
  silkscreen extent 0,-0.42 0,0.42, body extent -0.8,-0.3 0.8,0.3, height 0.9
0603-ipcsm_90#2 [mm] "0603-IPCSM_90"
  rect 0.9x0.75 smd: 1(0.775,0) 2(-0.775,0)
  silkscreen extent 0,-0.42 0,0.42, body extent -0.8,-0.3 0.8,0.3, height 0.9
0805-IPCsm_100 [mm] "0805-IPCSM_100"
  rect 0.95x1.5 smd: 1(-1.05,0) 2(1.05,0)
  silkscreen extent 0,-0.6 0,0.6, body extent -1.1,-0.6 1.1,0.6, height 1.1
0805-ipcsm_145#1 [mm] "0805-IPCSM_145"
  rect 0.95x1.5 smd mask+0.05: 1(-1.05,0) 2(1.05,0)
  silkscreen extent 0,-0.6 0,0.6, body extent -1.1,-0.6 1.1,0.6, height 1.45
0805-ipcsm_145#2 [mm] "0805-IPCSM_145"
  rect 0.95x1.5 smd: 1(-1.05,0) 2(1.05,0)
  silkscreen extent 0,-0.6 0,0.6, body extent -1.1,-0.6 1.1,0.6, height 1.45
BGA15_BQ27520YZFR [mm] "IC BATT FUEL GAUGE LIION 15DSBGA"
  round 0.25 smd: A1(-0.5,1) A2(0,1) A3(0.5,1) B1(-0.5,0.5) B2(0,0.5) B3(0.5,0.5) C1(-0.5,0) C2(0,0) C3(0.5,0) D1(-0.5,-0.5) D2(0,-0.5) D3(0.5,-0.5) E1(-0.5,-1) E2(0,-1) E3(0.5,-1)
  silkscreen extent -1.13,1.36 -1.04,1.46, body extent -0.98,-1.3 0.98,1.31, height 0.63
bga20_tps630252-YFF [mm] "IC REG BCK BST 3.3V 3.5A 20DSBGA"
  round 0.23 smd: A1(-0.6,0.8) A2(-0.2,0.8) A3(0.2,0.8) A4(0.6,0.8) B1(-0.6,0.4) B2(-0.2,0.4) B3(0.2,0.4) B4(0.6,0.4) C1(-0.6,0) C2(-0.2,0) C3(0.2,0) C4(0.6,0) D1(-0.6,-0.4) D2(-0.2,-0.4) D3(0.2,-0.4) D4(0.6,-0.4) E1(-0.6,-0.8) E2(-0.2,-0.8) E3(0.2,-0.8) E4(0.6,-0.8)
  silkscreen extent -1.04,1.1 -0.94,1.2, body extent -0.88,-1.04 0.89,1.05, height 0.63
con80_hirose-df40c-80ds_129h [mm] "CONN RCPT 80POS 0.4MM SMD GOLD"
  rect 0.2x0.7 smd mask+0.1: 1(7.8,1.54) 2(7.8,-1.54) 3(7.4,1.54) 4(7.4,-1.54) 5(7,1.54) 6(7,-1.54) 7(6.6,1.54) 8(6.6,-1.54) 9(6.2,1.54) 10(6.2,-1.54) 11(5.8,1.54) 12(5.8,-1.54) 13(5.4,1.54) 14(5.4,-1.54) 15(5,1.54) 16(5,-1.54) 17(4.6,1.54) 18(4.6,-1.54) 19(4.2,1.54) 20(4.2,-1.54) 21(3.8,1.54) 22(3.8,-1.54) 23(3.4,1.54) 24(3.4,-1.54) 25(3,1.54) 26(3,-1.54) 27(2.6,1.54) 28(2.6,-1.54) 29(2.2,1.54) 30(2.2,-1.54) 31(1.8,1.54) 32(1.8,-1.54) 33(1.4,1.54) 34(1.4,-1.54) 35(1,1.54) 36(1,-1.54) 37(0.6,1.54) 38(0.6,-1.54) 39(0.2,1.54) 40(0.2,-1.54) 41(-0.2,1.54) 42(-0.2,-1.54) 43(-0.6,1.54) 44(-0.6,-1.54) 45(-1,1.54) 46(-1,-1.54) 47(-1.4,1.54) 48(-1.4,-1.54) 49(-1.8,1.54) 50(-1.8,-1.54) 51(-2.2,1.54) 52(-2.2,-1.54) 53(-2.6,1.54) 54(-2.6,-1.54) 55(-3,1.54) 56(-3,-1.54) 57(-3.4,1.54) 58(-3.4,-1.54) 59(-3.8,1.54) 60(-3.8,-1.54) 61(-4.2,1.54) 62(-4.2,-1.54) 63(-4.6,1.54) 64(-4.6,-1.54) 65(-5,1.54) 66(-5,-1.54) 67(-5.4,1.54) 68(-5.4,-1.54) 69(-5.8,1.54) 70(-5.8,-1.54) 71(-6.2,1.54) 72(-6.2,-1.54) 73(-6.6,1.54) 74(-6.6,-1.54) 75(-7,1.54) 76(-7,-1.54) 77(-7.4,1.54) 78(-7.4,-1.54) 79(-7.8,1.54) 80(-7.8,-1.54)
  silkscreen extent -9.4,-1.52 9.4,1.52, body extent -9.4,-1.52 9.4,1.52, height 1.29
CON_HDR_1X3_RA [mil] "CON_HDR_1X3"
  rect 60x60 hole 39.37: 1(-100,0)
  round 60 hole 39.37: 2(0,0) 3(100,0)
  silkscreen extent -161,55 161,159, body extent -157,59 157,159, height 120
con_hdr_2x5_smt_50l#1 [mm] "CON_HDR_2X5_SMT_50L"
  rect 1.85x0.74 smd mask+0.05: 1(-2.125,2.54) 2(2.125,2.54) 3(-2.125,1.27) 4(2.125,1.27) 5(-2.125,0) 6(2.125,0) 7(-2.125,-1.27) 8(2.125,-1.27) 9(-2.125,-2.54) 10(2.125,-2.54)
  silkscreen extent -2.25,-3.81 2.12,3.81, body extent -2.1,-3.8 2.2,3.9, height 8.83
con_hdr_2x5_smt_50l#2 [mm] "CON_HDR_2X5_SMT_50L"
  rect 1.85x0.74 smd: 1(-2.125,2.54) 2(2.125,2.54) 3(-2.125,1.27) 4(2.125,1.27) 5(-2.125,0) 6(2.125,0) 7(-2.125,-1.27) 8(2.125,-1.27) 9(-2.125,-2.54) 10(2.125,-2.54)
  silkscreen extent -2.25,-3.81 2.12,3.81, body extent -2.1,-3.8 2.2,3.9, height 8.83
CON_JST_S3B-ZR-SM4A [mm] "CON_JST_S3B-ZR-SM4A"
  rect 0.7x2.5 smd mask+0.05: 1(1.5,-1.25) 2(0,-1.25) 3(-1.5,-1.25)
  rect 1.1x1.9 smd mask+0.05: 4(-3.45,2.35) 5(3.45,2.35)
  silkscreen extent -3.9,-2.79 3.9,4.1, body extent -3.9,-2.4 3.9,4.25, height 3.7
CON_USB_MOLEX_105164-0001 [mm] "CON_USB_MOLEX_105164-0001"
  rect 0.45x1.38 smd mask+0.05: 1(-1.3,0) 2(-0.65,0) 3(0,0) 4(0.65,0) 5(1.3,0)
  rect 1.475x2.1 smd mask+0.05: 6(-2.462,0.36) 7(2.462,0.36)
  rect 1.375x1.9 smd mask+0.05: 8(-0.938,2.66) 9(0.938,2.66)
  oval 1.4x2.2 hole 0.6 slot 1.3 at 90 deg mask+0.05: 10(-3.95,2.66) 11(3.95,2.66)
  silkscreen extent -4.1,-1.2 4.1,1.3, body extent -4.1,-0.38 4.1,4.81, height 2.8
DFN3-1006_50H [mm] "MOSFET N-CH 60V 260MA 3DFN"
  rect 0.4x0.7 smd mask+0.05: D(0.35,0)
  rect 0.4x0.25 smd mask+0.05: G(-0.35,0.225) S(-0.35,-0.225)
  silkscreen extent -0.72,-0.53 0.72,0.53, body extent -0.55,-0.35 0.58,0.35, height 0.5
DFN6-NC7S04_110H [mm] "Inverter IC 1 Channel 6-MicroPak"
  rect 0.3x0.49 smd paste-0.025 mask+0.05: 1(-0.5,-0.375) 2(0,-0.375) 3(0.5,-0.375) 4(0.5,0.375) 5(0,0.375) 6(-0.5,0.375)
  silkscreen extent -0.9,-0.92 0.9,0.5, body extent -0.73,-0.5 0.72,0.5, height 1.1
FTSH-117-01-XXX-DV-K [mil]
  rect 29x110 smd mask+2: 1(-400,-80) 2(-400,80) 3(-350,-80) 4(-350,80) 5(-300,-80) 6(-300,80) 7(-250,-80) 8(-250,80) 9(-200,-80) 10(-200,80) 11(-150,-80) 12(-150,80) 13(-100,-80) 14(-100,80) 15(-50,-80) 16(-50,80) 17(0,-80) 18(0,80) 19(50,-80) 20(50,80) 21(100,-80) 22(100,80) 23(150,-80) 24(150,80) 25(200,-80) 26(200,80) 27(250,-80) 28(250,80) 29(300,-80) 30(300,80) 31(350,-80) 32(350,80) 33(400,-80) 34(400,80)
  body extent -424,-68 425,68, height 220
ind-0603_38H [mm] "Chip Inductor, 2-Leads, Body 1.60x0.80mm, IPC Medium Density"
  rect 0.55x1 smd: 1(-0.625,0) 2(0.625,0)
  body extent -0.9,-0.5 0.9,0.5, height 1
ind-1008_35H [mm] "Chip Inductor, 2-Leads, Body 2.50x2.00mm, IPC Medium Density"
  rect 1.23x2.22 smd: 1(-1.085,0) 2(1.085,0)
  silkscreen extent -0.1,-1.01 0.1,1.01, body extent -1.35,-1.1 1.35,1.1, height 1
led_ltst-c191kgkt_s80#1 [mm] "LED_LTST-C191KGKT_S80"
  rect 0.8x0.8 smd mask+0.05: 1(-0.75,0) 2(0.75,0)
  silkscreen extent -0.15,-0.4 0.13,0.4, body extent -0.8,-0.4 0.8,0.4, height 0.65
led_ltst-c191kgkt_s80#2 [mm] "LED_LTST-C191KGKT_S80"
  rect 0.8x0.8 smd: 1(-0.75,0) 2(0.75,0)
  silkscreen extent -0.15,-0.4 0.13,0.4
led_RBG_1p6x1p6_sm [mm] "led_RBG_1p6x1p6_sm"
  rect 0.85x0.5 smd mask+0.1: 1(0.875,-0.5) 2(-0.875,-0.5) 3(-0.875,0.5) 4(0.875,0.5)
  silkscreen extent -0.2,-1.05 1.65,0.8, body extent -0.8,-0.8 0.8,0.8, height 0.7
MLP8_N25Q032A_F6 [mm] "SON, 8-Leads, Body 5.00x6.00mm, Pitch 1.27mm, Thermal Pad 4.05x3.40mm, IPC Medium Density"
  rect 1.1x0.45 smd: 1(-2.79,1.905) 2(-2.79,0.635) 3(-2.79,-0.635) 4(-2.79,-1.905) 5(2.79,-1.905) 6(2.79,-0.635) 7(2.79,0.635) 8(2.79,1.905)
  rect 3.4x4.05 smd paste-1.7: 9(0,0)
  silkscreen extent -3.6,-2.65 3.15,2.7, body extent -3,-2.5 3,2.5, height 1
MTGC425H215P [mm] "MTGC425H215P"
  round 4.25 hole 2.15: 1(0.007,0.011)
QFN24_BQ24297RGE [mm] "QFN24_BQ24297RGE"
  oval 0.85x0.28 smd mask+0.05: 1(-1.975,1.25) 2(-1.975,0.75) 3(-1.975,0.25) 4(-1.975,-0.25) 5(-1.975,-0.75) 6(-1.975,-1.25) 13(1.975,-1.25) 14(1.975,-0.75) 15(1.975,-0.25) 16(1.975,0.25) 17(1.975,0.75) 18(1.975,1.25)
  oval 0.28x0.85 smd mask+0.05: 7(-1.25,-1.975) 8(-0.75,-1.975) 9(-0.25,-1.975) 10(0.25,-1.975) 11(0.75,-1.975) 12(1.25,-1.975) 19(1.25,1.975) 20(0.75,1.975) 21(0.25,1.975) 22(-0.25,1.975) 23(-0.75,1.975) 24(-1.25,1.975)
  rect 2.7x2.7 smd paste-2.7 mask+0.05: pad(0,0)
  silkscreen extent -2.63,-2 2,2.03, body extent -2,-2 2,2, height 1
r-0805_20H [mm] "Chip Resistor, 2-Leads, Body 2.03x1.27mm, IPC Medium Density"
  rect 1.25x1.55 smd: 1(-0.875,0) 2(0.875,0)
  body extent -1.14,-0.76 1.14,0.76, height 0.59
SOD882-60 [mm] "SOD882 .6mm High"
  rect 0.325x0.65 smd: A(0.325,0) C(-0.325,0)
  silkscreen extent -0.4,-0.55 1.18,0.55, body extent -0.4,-0.3 0.4,0.3, height 0.6
sod923-40 [mm] "SOD923 .4mm High"
  rect 0.36x0.25 smd: A(0.42,0) C(-0.42,0)
  silkscreen extent -0.4,-0.4 1.44,0.4, body extent -0.4,-0.3 0.4,0.3, height 0.4
SON6_TI_DRY [mm] "IC REG LDO 3.3V 1A 6SON"
  rect 0.3x0.52 smd paste-5 mask+0.05: 1(-0.5,-0.385) 2(0,-0.385) 3(0.5,-0.385) 4(0.5,0.385) 5(0,0.385) 6(-0.5,0.385)
  silkscreen extent -0.85,-0.7 0.85,0.7, body extent 0.98,-0.55 2.48,0.95, height 0.8
SON6_TPS73733DRV [mm] "IC REG LDO 3.3V 1A 6SON"
  rect 0.3x0.7 smd paste-0.05: 1(-0.65,-1.05) 2(0,-1.05) 3(0.65,-1.05) 4(0.65,1.05) 5(0,1.05) 6(-0.65,1.05)
  rect 1.6x1 smd paste-0.05: 7(0.025,0)
  silkscreen extent -1.4,-1.4 1.05,1.05, body extent -1.05,-1.05 1.05,1.05, height 0.8
SOT23_44H [mm] "SOT23_44H"
  rect 0.7x0.9 smd: 1(-0.95,-1.122) 2(0.95,-1.122) 3(0,0.648)
  silkscreen extent -1.6,-0.39 1.55,0.56
SOT23_112 [mm] "SOT23_112"
  rect 0.802x0.972 smd: 1(0,0) 2(1.9,0) 3(0.95,1.77)
  silkscreen extent -0.65,0.73 2.5,1.68, body extent -0.55,0.18 2.45,1.58, height 1.1
standoff_hole2p50p [mm] "standoff_hole2p50p"
  round 4.19 hole 2.5: 1(0,0)
stqfn14_250x160x60 [mm] "STQFN14"
  rect 0.7x0.2 smd mask+0.05: 1(-0.65,0.6)
  rect 0.6x0.2 smd mask+0.05: 2(-0.7,0.2) 3(-0.7,-0.2) 4(-0.7,-0.6) 8(0.7,-0.6) 9(0.7,-0.2) 10(0.7,0.2) 11(0.7,0.6)
  rect 0.2x0.6 smd mask+0.05: 5(-0.4,-1.15) 6(0,-1.15) 7(0.4,-1.15) 12(0.4,1.15) 13(0,1.15) 14(-0.4,1.15)
  silkscreen extent -1.34,-1.4 1,1.4, body extent -0.8,-1.25 0.8,1.25, height 0.6
SW_EVQP2 [mm] "SW_EVQP2"
  rect 1.45x1 smd mask+0.05: 1(-2.575,-0.85) 2(-2.575,0.85) 3(2.575,-0.85) 4(2.575,0.85)
  silkscreen extent -3.02,-1.92 2.3,1.9, body extent -2.4,-1.75 2.3,1.75, height 1.75
TP-S100_SMT [mm] "TP-S100_SMT"
  round 1 smd paste-0.5: 1(0,0)
  body extent -0.5,-0.5 0.5,0.5, height 0.01
TPC150H080P [mm]
  round 1.5 hole 0.8: 1(0,0)
"UQFN6_ USBULC6-2M6" [mm] "IC REG LDO 3.3V 1A 6SON"
  rect 0.25x0.65 smd paste-0.05 mask+0.07: 1(-0.5,-0.475) 2(0,-0.475) 3(0.5,-0.475) 4(0.5,0.475) 5(0,0.475) 6(-0.5,0.475)
  silkscreen extent -0.82,-1.12 0.87,0.65, body extent -0.72,-0.8 0.72,0.8, height 0.6

## Part data
C1 C2 C3 C7 C8 C10: library part GRM155R71C104KA88D, "CAP CER .1UF 16V X7R 0402"
C4 C9 C54 C68: library part C2012X5R0J476M125AC, "CAP CER 47UF 6.3V 20% X5R 0805"
C5 C52 C58 C61: library part GRM188R61E105KA12D, "CAP CER 1UF 25V 10% X5R 0603"
C6 C62 C63 C64 C65 C66 C111: library part C0603C104J4RACTU, "CAP CER 0.1UF 16V 5% X7R 0603"
C53: library part C1005X7R1H473K050BB, "CAP CER 0.047UF 50V 10% X7R 0402"
C59: library part CL05A106MP5NUNC, "CAP CER 10UF 10V 20% X5R 0402"
C60: library part C2012JB1A226M085AC, "CAP CER 22UF 10V 20% JB 0805"
C70 C72: library part C1608X5R1A106K080AC, "CAP CER 10UF 10V 10% X5R 0603"
C71: library part GRM155R71E103KA01D, "CAP, 0.01 uF, 25V, 10%, 0402, X7R"
D1: "DIODE SWITCH DUAL CC 70V SOT23"
D2 D3: "TVS DIODE 3.3VWM 7.8VC SOD923"
D4 D5 D7: "TVS DIODE 5VWM 12VC SOD882"
D6 D8 D12 D16: library part LTST-C191KGKT, "LED GREEN CLEAR THIN 0603 SMD"
D19 D20: "LED RGB CLEAR 0606 SMD"
D22: library part LTST-C191KRKT, "LED RED CLEAR 0603 SMD"
FB1: library part MPZ1608S221A, "FERRITE CHIP 220 OHM 2A 0603"
J1: "3 Positions Header, Shrouded Connector 0.059\" (1.50mm) Surface Mount, Right Angle Tin"
J2: library part FTSH-117-01-F-DV-k, "34 Positions Header, Shrouded Connector 0.050\" (1.27mm) Surface Mount Gold"
J3: "3 Positions Header, Unshrouded Connector 0.100\" (2.54mm) Through Hole, Right Angle Gold"
J4 J11: "CONN HEADER .050\" 10PS DL SMD AU"
J8: library part DF40HC(3.0)-80DS-0.4V(51), "CONN RCPT 80POS 0.4MM SMD GOLD 3.0MM"
J19: library part 105164-0001, "USB - micro B Receptacle Connector 5 Position Surface Mount, Right Angle, Horizontal"
L1 L2: library part LQM2HPN1R0MG0L, "INDUCTOR 1.0UH 20% 1600MA 1008"
M1 M2 M3 M4: "MTG, 4.25mm PAD, 2.15mm Plated Hole"
M5 M6: "SMT mounted PEM Standoff, M1, length 3mm"
Q1: "MOSFET N-CH 60V 260MA 3DFN"
Q2: library part IRLML6401TRPBF, "MOSFET P-CH 12V 4.3A SOT-23"
R1: library part MCR01MZPJ101, "RES 100 OHM 5% 0402 SMD"
R2 R149: library part ERJ-2RKF2400X, "RES 240 OHM 1/10W 1% 0402 SMD"
R3 R4 R150 R151: library part RC0402FR-07124RL, "RES SMD 124 OHM 1% 1/16W 0402"
R5 R12 R16 R71 R73 R76 R79 R85 R92 R152: library part ERJ-2GEJ103X, "RES 10K OHM 1/10W 5% 0402 SMD"
R6 R7: library part ERJ-2GEJ104X, "RES 100K OHM 1/16W 5% 0402 SMD"
R8 R11 R74 R78 R80 R83: library part ERJ-2GE0R00X, "RES 0.0 OHM 1/10W JUMP 0402 SMD"
R9 R13 R14 R15 R84: library part RC0603FR-071KL, "RES 1K 1/10W 1% 0603 SMD"
R10: library part ERJ-2RKF3001X, "RES 3.00K OHM 1/16W 1% 0402 SMD"
R68: library part ERJ-2GEJ222X, "RES SMD 2.2K OHM 5% 1/10W 0402"
R72: library part ERJ-2RKF5231X, "RES 5.23K OHM 1/10W 1% 0402 SMD"
R75: library part ERJ-2RKF3162X, "RES 31.6K OHM 0.1W 1% 0402 SMD"
R77: library part ERJ-2RKF4300X, "RES 430 OHM 1/10W 1% 0402 SMD"
R81: library part ERJ-3EKF1804V, "RES 1.80M OHM 1/10W 1% 0603 SMD"
R82: library part ERJ-3EKF1822V, "RES 18.2K OHM 1/10W 1% 0603 SMD"
R86 R88: library part ERJ-3GEYJ101V, "RES 100 OHM 1/10W 5% 0603 SMD"
R87: library part PMR10EZPFU10L0, "RES 0.01 OHM 1/2W 1% 0805 SMD"
R91: library part ERJ-2RKF5233X, "RES SMD 523K OHM 1% 1/10W 0402"
R93: library part ERJ-2RKF1433X, "RES 143K OHM 1/16W 1% 0402 SMD"
R153: library part ERJ-2GEJ330X, "RES 33 OHM 1/16W 5% 0402 SMD"
S1 S2 S3: "SWITCH TACTILE SPST-NO 0.02A 15V"
TP1 TP39 TP40 TP41 TP75 TP77 TP89 TP92: "TESTPOINT, 1.5mm pad, 0.8 mm plated"
TP2 TP3 TP4 TP5 TP6 TP7 TP8 TP9 TP10 TP11 TP12 TP13 TP14 TP15 TP16 TP17 TP18 TP19 TP20 TP21 TP22 TP23 TP24 TP25 TP26 TP27 TP28 TP29 TP30 TP31 TP32 TP33 TP34 TP35 TP36 TP37 TP38 TP42 TP43 TP44 TP45 TP46 TP47 TP48 TP49 TP50 TP51 TP52 TP53 TP54 TP55 TP56 TP57 TP58 TP59 TP60 TP61 TP62 TP78 TP79 TP80 TP81 TP82 TP84: library part TP0042, "TESTPOINT, 1MM SMD, Square pad, Round SM opening"
U1: "TVS DIODE 5VWM 17VC 6VFQFPN"
U2: library part SN74LVC1G18DRYR, "IC SGL OPEN DRAIN BUFFER SC70-5"
U3: "GreenPAK Programmable Mixed Signal Array 14 pin"
U4: "Inverter IC 1 Channel 6-MicroPak"
U15: library part BQ24297RGET, "IC LI+ CHARGER PWR MGMT 24VQFN"
U17: library part BQ27520YZFR-G4, "IC BATT FUEL GAUGE LIION 15DSBGA"
U18: library part TPS630250YFFT, "IC REG BCK BST ADJ 2A/4A 20DSBGA"
U21: "IC REG LDO 3.3V 1A 6SON"
U28: "IC FLASH 32MBIT 108MHZ 8VDFN"

## Free pads (board coordinates)
  round 1.2 hole 1.2 unplated: 0(0,37.113) 0(41.7,4)

## Via types
v1: diameter 0.5, hole 0.25, Top Layer to Bottom Layer, tented both sides, 341 vias
v2: diameter 0.4, hole 0.2, Top Layer to Bottom Layer, tented both sides, 5 vias

## Nets (pads, with @x,y where several pads share a name; then routed paths per layer and width w, separated by ;. In a path a pad name is that pad's centre, name@x,y a point inside that pad or via, vN(x,y) a via of type N, cw(c..) or ccw(c..) an arc to the next point about the centre after c; other vN are vias at no path point)
3V3_APP_EN: U4.4 U21.4 | length 1.5
  Top Layer w0.1: U4.4@5.733,26.464 5.747,26.45 U21.4@7.1,26.45 U21.4@7.033,26.517
3V3_APP_NEN: J8.40 R12.2 TP36.1 U4.2 | length 30.6
  Top Layer w0.1: U4.2@4.983,26.964 4.536,26.964 4.175,27.325 4.175,29.675 6,31.5 v1(6,34.1) R12.2@5.275,34.1 ; R12.2@5.238,34.062 R12.2@5.275,34.1 ; R12.2@5.25,34.1 R12.2@5.275,34.1 ; J8.40@20.65,33.04 v1(20.65,33.925)
  Bottom Layer w0.1: v1(6,34.1) 6.025,34.1 9.225,37.3 19.3,37.3 20.075,36.525 20.075,35.825 20.65,35.25 v1(20.65,33.925) 20.65,33.575 21.45,32.775 TP36.1@21.475,32.775 TP36.1@21.85,32.775
3V6_EN: R92.1 U3.13 U18.D4 | length 10.5
  Top Layer w0.2: v1(31.35,17.625) 31.525,17.45 U3.13@32.1,17.45 ; U18.D4@32.348,20.637 32.937,20.637 33.315,21.015 R92.1@34.897,21.015 34.907,21.025 v1(35.625,21.025)
  Bottom Layer w0.2: v1(31.35,17.625) 33.155,17.625 35.625,20.095 v1(35.625,21.025)
3V6_FB: R91.2 R93.1 U18.A4 | length 2.1
  Top Layer w0.25: U18.A4@32.348,21.837 32.822,22.311 32.822,22.8 R91.2@32.825,22.8 R93.1@33.7,22.8 33.707,22.8 R93.1@33.747,22.84
3V6_OUT: C5.1 C68.1 Q2.2 R6.1 R91.1 TP89.1 U18.A1 U18.A2 U18.A3 | length 0.3
  Top Layer w0.2: C68.1@28.95,24.125 C68.1@29.05,24.025 ; C5.1@29,25.925 C5.1@29,26.125
3V6_VINA: C6.1 R8.2 U18.E4 | length 4.2
  Top Layer w0.2: U18.E4@32.348,20.237 33.138,20.237 33.125,20.25 ; 32.922,20.25 33.125,20.25 ; C6.1@36.15,19.95 35.85,20.25 R8.2@34.9,20.25 33.125,20.25
BAT_CE: R79.2 U17.D2 | length 2.4
  Top Layer w0.08: 35.825,13 36.05,12.775 37.048,12.775
  Top Layer w0.1: R79.2@35.1,13.098 35.198,13 35.825,13 ; 37.048,12.775 U17.D2@37.3,12.523
BAT_INT: R80.1 U17.A2 | length 22.4
  Top Layer w0.1: R80.1@23.85,18.35 23.862,18.338 v1(23.862,17.3) ; U17.A2@38.8,12.523 39.161,12.162 v1(40.4,12.162)
  Bottom Layer w0.1: v1(23.862,17.3) 26.225,17.3 26.6,16.925 27.35,16.925 28.151,16.124 29.659,16.124 29.811,16.276 32.149,16.276 32.8,15.625 38.35,15.625 40.4,13.575 v1(40.4,12.162)
BATCHG_INT: J8.63 R78.2 R80.2 TP84.1 | length 13.4
  Top Layer w0.1: v1(23.05,19.875) R78.2@23.05,19.25 R80.2@23.85,19.25 ; J8.63@25.41,29.832 25.451,29.791 v1(25.451,28.576)
  Bottom Layer w0.1: v1(23.05,19.875) 23.05,22.85 22.075,23.825 22.075,25.175 24.75,27.85 25.15,27.85 25.451,28.151 v1(25.451,28.576)
BATT+: C58.1 D5.C J1.1 TP41.1 U15.13 U15.14 U17.E2 | length 10.8
  Top Layer w0.25: U15.13@26.629,7.798 U15.14@26.629,8.298 ; U15.13@26.654,7.77 27.33,7.77 27.6,7.5 ; 31.375,7.45 32.075,7.45 32.975,8.35 32.975,11.35 34.148,12.523 U17.E2@36.8,12.523
BATT-: J1.3 R86.2 R87.1 TP39.1 | length 0.1
  Top Layer w0.25: R86.2@41.154,7.925 R86.2@41.154,8
BATT_TS: D4.C J1.2 R74.2 R83.2 TP40.1 | length 13.1
  Top Layer w0.25: D4.C@35,4.55 D4.C@35,4.5 ; R83.2@35.054,6.698 35.05,5.3 35.002,5.252 D4.C@35,4.5 ; J1.2@35.15,2.4 35.15,3.825 35,3.975 D4.C@35,4.5
  Top Layer w0.35: v1(30.55,1.9) 30.55,2.546 30.5,2.596 R74.2@30.554,2.65 ; R83.2@35.052,6.7 R83.2@35.054,6.698 ; TP40.1@35.15,-0.05 J1.2@35.15,2.4
  Bottom Layer w0.35: v1(30.55,1.9) 30.55,1.85 32.45,-0.05 TP40.1@35.15,-0.05
BTN_SYS_CONT: J2.18 S3.2 S3.4 U3.2 | length 49.4
  Top Layer w0.1: J2.18@3.025,13.51 4.89,13.51 v1(4.9,13.5) ; v1(19.6,17) 20.8,17 21.525,16.275 24.213,16.275 24.368,16.12 25.08,16.12 25.4,15.8 29.125,15.8 29.5,16.175 v1(29.5,16.55) ; v1(33.05,16.05) U3.2@33.05,16.75 ; v1(40.2,17.3) S3.2@40.2,18.525 S3.4@40.2,23.675
  Bottom Layer w0.1: v1(4.9,13.5) 7.2,11.2 13.8,11.2 v1(19.6,17) ; v1(29.5,16.55) 32.55,16.55 v1(33.05,16.05) 38.95,16.05 v1(40.2,17.3)
BTN_SYS_MCU: J8.29 TP25.1 U3.10 U3.11 | length 27.9
  Top Layer w0.1: J8.29@18.65,29.96 18.65,31 18.825,31.175 24.692,31.175 25.017,31.5 v1(29.7,31.5) ; U3.11@32.65,18.15 32.65,18.675 v1(32.85,18.875) 33.05,18.675 U3.10@33.05,18.15
  Bottom Layer w0.1: v1(29.7,31.5) TP25.1@32.8,28.4 32.85,28.35 32.85,18.9 v1@32.875,18.875
CHG_BTST: C53.2 U15.21 | length 1.3
  Top Layer w0.254: U15.21@24.929,11.048 24.929,11.993 C53.2@25.204,12.268
CHG_C\E\: D22.1 R71.1 TP81.1 U15.9 U17.B2 | length 40.3
  Top Layer w0.08: 38.555,12.775 39.25,12.775
  Top Layer w0.1: U15.9@24.429,7.045 24.429,6.546 26.2,4.775 26.65,4.775 27.016,4.409 R71.1@27.016,3.55 ; v1(24.525,16.5) 24.5,16.5 24.498,16.498 D22.1@25.903,16.498 ; U17.B2@38.3,12.523 38.303,12.523 38.555,12.775 ; 39.25,12.775 39.425,12.6 v1(39.85,12.6)
  Bottom Layer w0.1: v1(26.65,4.75) 26.65,5.7 25.975,6.375 24.65,6.375 23.2,7.825 23.2,12.5 24.15,13.45 24.15,16.125 v1(24.525,16.5) TP81.1@25.525,16.5 27.4,16.5 28.404,15.496 30.181,15.496 30.355,15.67 32.23,15.67 32.55,15.35 38.25,15.35 39.85,13.75 v1(39.85,12.6)
CHG_INT: R78.1 U15.7 | length 16.7
  Top Layer w0.1: v1(20.95,18.3) 23,18.3 R78.1@23.05,18.35 ; v1(21.925,6.4) 23.1,6.4 23.404,6.704 U15.7@23.404,7.073
  Bottom Layer w0.1: v1(20.95,18.3) 20.95,15.8 20.625,15.475 20.625,9.575 21.45,8.75 21.45,6.875 v1(21.925,6.4)
CHG_OTG: R73.1 U15.8 | length 4.5
  Top Layer w0.1: U15.8@23.929,7.045 23.929,6.471 26.2,4.2 26.2,3.65 R73.1@26.1,3.55
CHG_PMID: C60.1 U15.23 | length 1.9
  Top Layer w0.2: C60.1@23.354,12.498 23.704,12.498 C60.1@23.704,12.2 ; U15.23@23.904,11.023 U15.23@23.929,11.048
  Top Layer w0.25: C60.1@23.704,12.2 23.929,11.975 U15.23@23.929,11.048
CHG_REGN: C59.1 R72.1 U15.22 | length 12.9
  Top Layer w0.1: v1(28.225,6.1) 28.225,5.525 R72.1@28.4,5.35
  Top Layer w0.25: U15.22@24.429,10.995 24.429,11.823 24.554,11.948 v1(24.554,12.548) 24.554,12.998 C59.1@24.754,13.198
  Bottom Layer w0.1: v1(24.554,12.548) 24.554,10.854 24.2,10.5 24.2,7.6 24.7,7.1 26.1,7.1 27.1,6.1 v1(28.225,6.1)
CHG_STAT: D12.2 U15.4 | length 9.4
  Top Layer w0.1: v1(19.35,14.175) 19.35,14.2 D12.2@20.05,14.9 ; v1(20.8,8.425) 21.525,8.425 21.873,8.773 22.654,8.773 U15.4@22.629,8.748
  Bottom Layer w0.1: v1(19.35,14.175) 19.35,14.15 19.6,13.9 19.6,12.825 20.3,12.125 20.3,8.975 20.8,8.475 v1(20.8,8.425)
CHG_SW: C53.1 L1.1 U15.19 U15.20
CHG_TS: R72.2 R74.1 R75.1 R76.1 TP78.1 U15.11 | length 9.6
  Top Layer w0.1: U15.11@25.429,7.045 25.429,6.446 26.375,5.5 27.2,5.5 28.754,3.946 R75.1@28.754,3.55 R76.1@29.654,3.55 R74.1@30.554,3.55 31.075,4.071 v1(31.075,4.1)
  Bottom Layer w0.1: v1(31.075,4.1) TP78.1@31.075,5.825
FG_TOUT: R81.2 R82.2 U17.E3 | length 3.6
  Top Layer w0.1: R81.2@34.498,10.323 R82.2@36.054,10.323 36.1,10.368 36.1,10.95 36.826,11.676 U17.E3@36.826,12.006
FG_TS: C62.1 R84.1 U17.D3 | length 2.5
  Top Layer w0.1: U17.D3@37.3,12.023 37.3,10.648 R84.1@37.4,10.548 ; R84.1@37.419,10.348 C62.1@38.443,10.348
FG_VCC: C61.1 R81.1 U17.D1 | length 10.8
  Top Layer w0.1: v1(34.3,7.8) 34.3,8.2 34.8,8.7 R81.1@34.8,8.8
  Top Layer w0.25: U17.D1@37.3,13.025 U17.D1@37.3,13.025 37.3,14.1 ; v1(37.3,13.7) 37.3,14.1 ; C61.1@37.95,14.85 37.95,14.75 37.3,14.1
  Bottom Layer w0.1: v1(34.3,7.8) 37.3,10.8 v1(37.3,13.7)
FLASH_NCS: R152.2 U2.4 U28.1 | length 5
  Top Layer w0.1: U28.1@11.277,22.18 12.495,22.18 12.75,21.925 v1(12.8,21.925) R152.2@12.8,21.25 ; v1(13.9,20.3) U2.4@14.5,20.3
  Bottom Layer w0.1: v1(12.8,21.925) 12.8,21.875 13.9,20.775 v1(13.9,20.3)
FLEX_A_MISO: J2.16 J8.51 TP6.1 | length 33.2
  Top Layer w0.1: J2.16@3.025,14.78 v1(4.9,14.78) ; v1(23.05,28.55) J8.51@23.05,29.96
  Bottom Layer w0.1: v1(4.9,14.78) 6.88,12.8 9.5,12.8 9.9,12.4 13.8,12.4 19.4,18 19.4,19.483 19.7,19.783 TP6.1@19.7,20.7 19.7,24.351 23.05,27.701 v1(23.05,28.55)
FLEX_A_MOSI: J2.14 J8.53 TP5.1 | length 35.1
  Top Layer w0.1: J2.14@3.275,16.05 4.175,16.05 4.4,15.825 v1(4.4,15.325) ; v1(23.45,29.075) J8.53@23.45,29.96
  Bottom Layer w0.1: v1(4.4,15.325) 4.525,15.325 4.375,15.175 4.375,14.6 6.875,12.1 TP5.1@8.975,12.1 14.025,12.1 19.775,17.85 19.775,19.15 20.566,19.941 20.566,24.934 23.45,27.819 v1(23.45,29.075)
FLEX_A_SCLK: J2.26 J8.55 TP7.1 | length 36
  Top Layer w0.1: J2.26@3.025,8.43 4.595,8.43 5.25,7.775 v1(5.25,7.725) ; v1(23.85,28.55) J8.55@23.85,29.96
  Bottom Layer w0.1: v1(5.25,7.725) 7.25,7.725 8.525,9 9.4,9 10.7,10.3 13.875,10.3 19.075,15.5 TP7.1@19.1,15.5 20.275,16.675 20.275,18.475 21.007,19.207 21.007,25.093 23.85,27.936 v1(23.85,28.55)
FLEX_B_MISO: J2.6 J8.74 R153.1 TP13.1 | length 36.7
  Top Layer w0.1: J2.6@2.24,21.1 J2.6@2.715,21.1 ; J2.6@2.705,21.09 J2.6@2.715,21.1 ; v1(6.488,21.088) 6.475,21.1 J2.6@2.715,21.1 ; R153.1@11.322,23.49 11.332,23.5 v1(12.1,23.5) ; v1(18.85,27.025) 18.85,27.075 18.9,27.025 18.9,27.1 19.225,27.425 v1(24.9,27.425) ; J8.74@27.45,33.04 v1(27.45,33.775)
  Bottom Layer w0.1: v1(6.488,21.088) 6.5,21.075 6.85,21.075 9.275,23.5 v1(12.1,23.5) TP13.1@15.85,23.5 ; TP13.1@15.85,23.525 TP13.1@15.875,23.525 17.142,23.525 18.875,25.258 v1@18.875,27.025 ; v1(18.85,27.025) v1@18.875,27.025 ; v1@18.912,27.013 v1@18.9,27.025 ; v1(24.9,27.425) 25.275,27.425 25.851,28.001 25.851,29.099 25.3,29.65 25.3,32.4 25.875,32.975 26.65,32.975 v1(27.45,33.775) ; v1@18.875,27.025 18.875,27.05 v1@18.9,27.025 ; v1@18.875,27.025 v1@18.9,27.025
FLEX_B_MOSI: J2.8 J8.76 TP9.1 U28.5 | length 46.1
  Top Layer w0.1: J2.8@3.405,19.825 J2.8@3.63,19.825 ; J2.8@3.575,19.88 J2.8@3.63,19.825 ; U28.5@7.467,16.6 7.075,16.6 6.925,16.75 6.925,18.825 5.925,19.825 v1(4.675,19.825) J2.8@3.63,19.825 ; v1(18.95,23.225) 18.975,23.225 21.15,25.4 v1(24.6,25.4) ; v1(27.85,32.325) J8.76@27.85,33.04
  Bottom Layer w0.1: v1(4.675,19.825) 4.45,19.825 4.3,19.675 4.3,17.3 4.68,16.92 8.63,16.92 9.8,15.75 13.65,15.75 TP9.1@13.75,15.65 13.825,15.725 15.424,15.725 17.925,18.226 17.925,22.175 18.95,23.2 v1(18.95,23.225) ; v1(24.6,25.4) 25,25.4 26.85,27.25 26.85,30.75 27.85,31.75 v1@27.85,32.325
FLEX_B_SCLK: J2.4 J8.72 TP8.1 U28.6 | length 46.5
  Top Layer w0.1: J2.4@3.275,22.4 3.3,22.375 v1(4.425,22.375) ; v1(8.737,15.525) U28.6@8.737,16.6 ; v1(18.8,21.95) 21.575,24.725 v1(22.775,24.725) ; v1(27.05,31.925) J8.72@27.05,33.04
  Bottom Layer w0.1: v1(4.425,22.375) 4.175,22.125 4.175,21.125 TP8.1@4.2,21.1 3.675,20.575 3.675,17.125 4.425,16.375 7.85,16.375 8.7,15.525 v1(8.737,15.525) 8.737,14.463 10.1,13.1 13.5,13.1 18.475,18.075 18.475,21.625 v1(18.8,21.95) ; v1(22.775,24.725) 24.325,26.275 24.9,26.275 26.35,27.725 26.35,31.225 v1(27.05,31.925)
FLEX_C_MISO: J8.30 TP19.1 | length 3.9
  Top Layer w0.1: J8.30@18.65,33.04 v1(18.65,34.45)
  Bottom Layer w0.1: v1(18.65,34.45) 18.65,33.225 19.05,32.825 TP19.1@19.75,32.825
FLEX_C_MOSI: J8.28 TP18.1 | length 5.8
  Top Layer w0.1: J8.28@18.25,33.04 v1(18.25,33.925)
  Bottom Layer w0.1: TP18.1@13.925,34.275 TP18.1@13.975,34.275 16.3,34.275 17.175,33.4 17.825,33.4 18.25,33.825 v1(18.25,33.925)
FLEX_C_SCLK: J8.26 TP20.1 | length 5.8
  Top Layer w0.1: J8.26@17.85,33.04 v1(17.85,34.45)
  Bottom Layer w0.1: TP20.1@14.275,35.775 14.3,35.8 16.95,35.8 17.85,34.9 v1(17.85,34.45)
FPGA_GPIO_1: J2.27 J8.34 TP3.1 | length 50.7
  Top Layer w0.1: J2.27@-1.452,7.12 -1.447,7.125 v1(0.6,7.125) ; J8.34@19.45,33.04 v1(19.45,34.45)
  Bottom Layer w0.1: v1(0.6,7.125) -1.2,8.925 -1.2,23.125 -0.225,24.1 1.7,24.1 2.7,25.1 2.7,26.2 3.5,27 3.5,31.3 4.875,32.675 6.575,32.675 8.35,34.45 10.575,34.45 TP3.1@11.75,35.625 12.925,36.8 17.15,36.8 19.45,34.5 v1(19.45,34.45)